# Altium PCB RotorStator_PowerControl.PcbDoc
Units mm, origin at the board's own origin, x right, y up, seen from the top; angles counter-clockwise.
Board outline 120 x 110 mm, 4 copper layers (TOP_SIG, GND, PWR, BTM_SIG), stack 1.586 mm thick; 55 components, 47 nets, 194 pads, 1858 vias.
Unrouted connection lines stored in the file: 2.
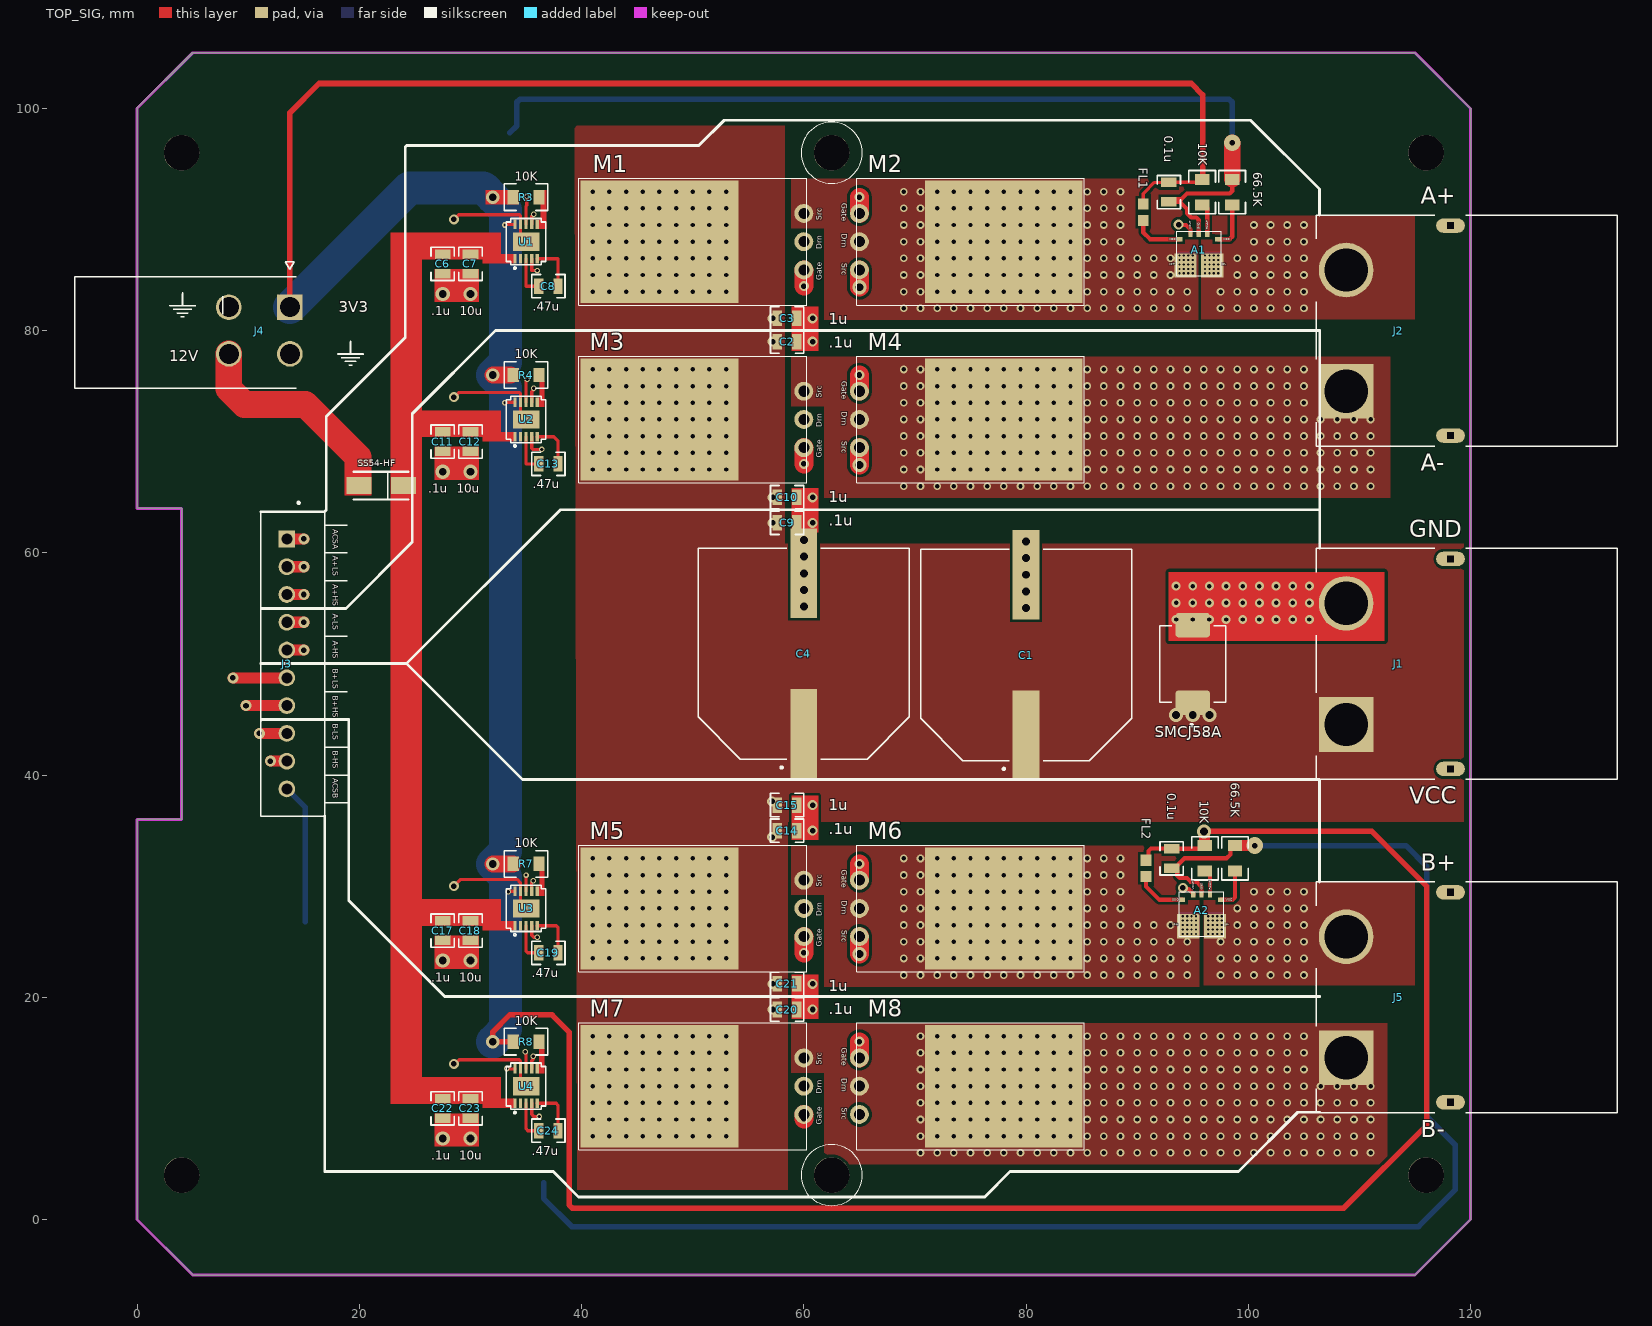
[diagram p0: TOP_SIG view]
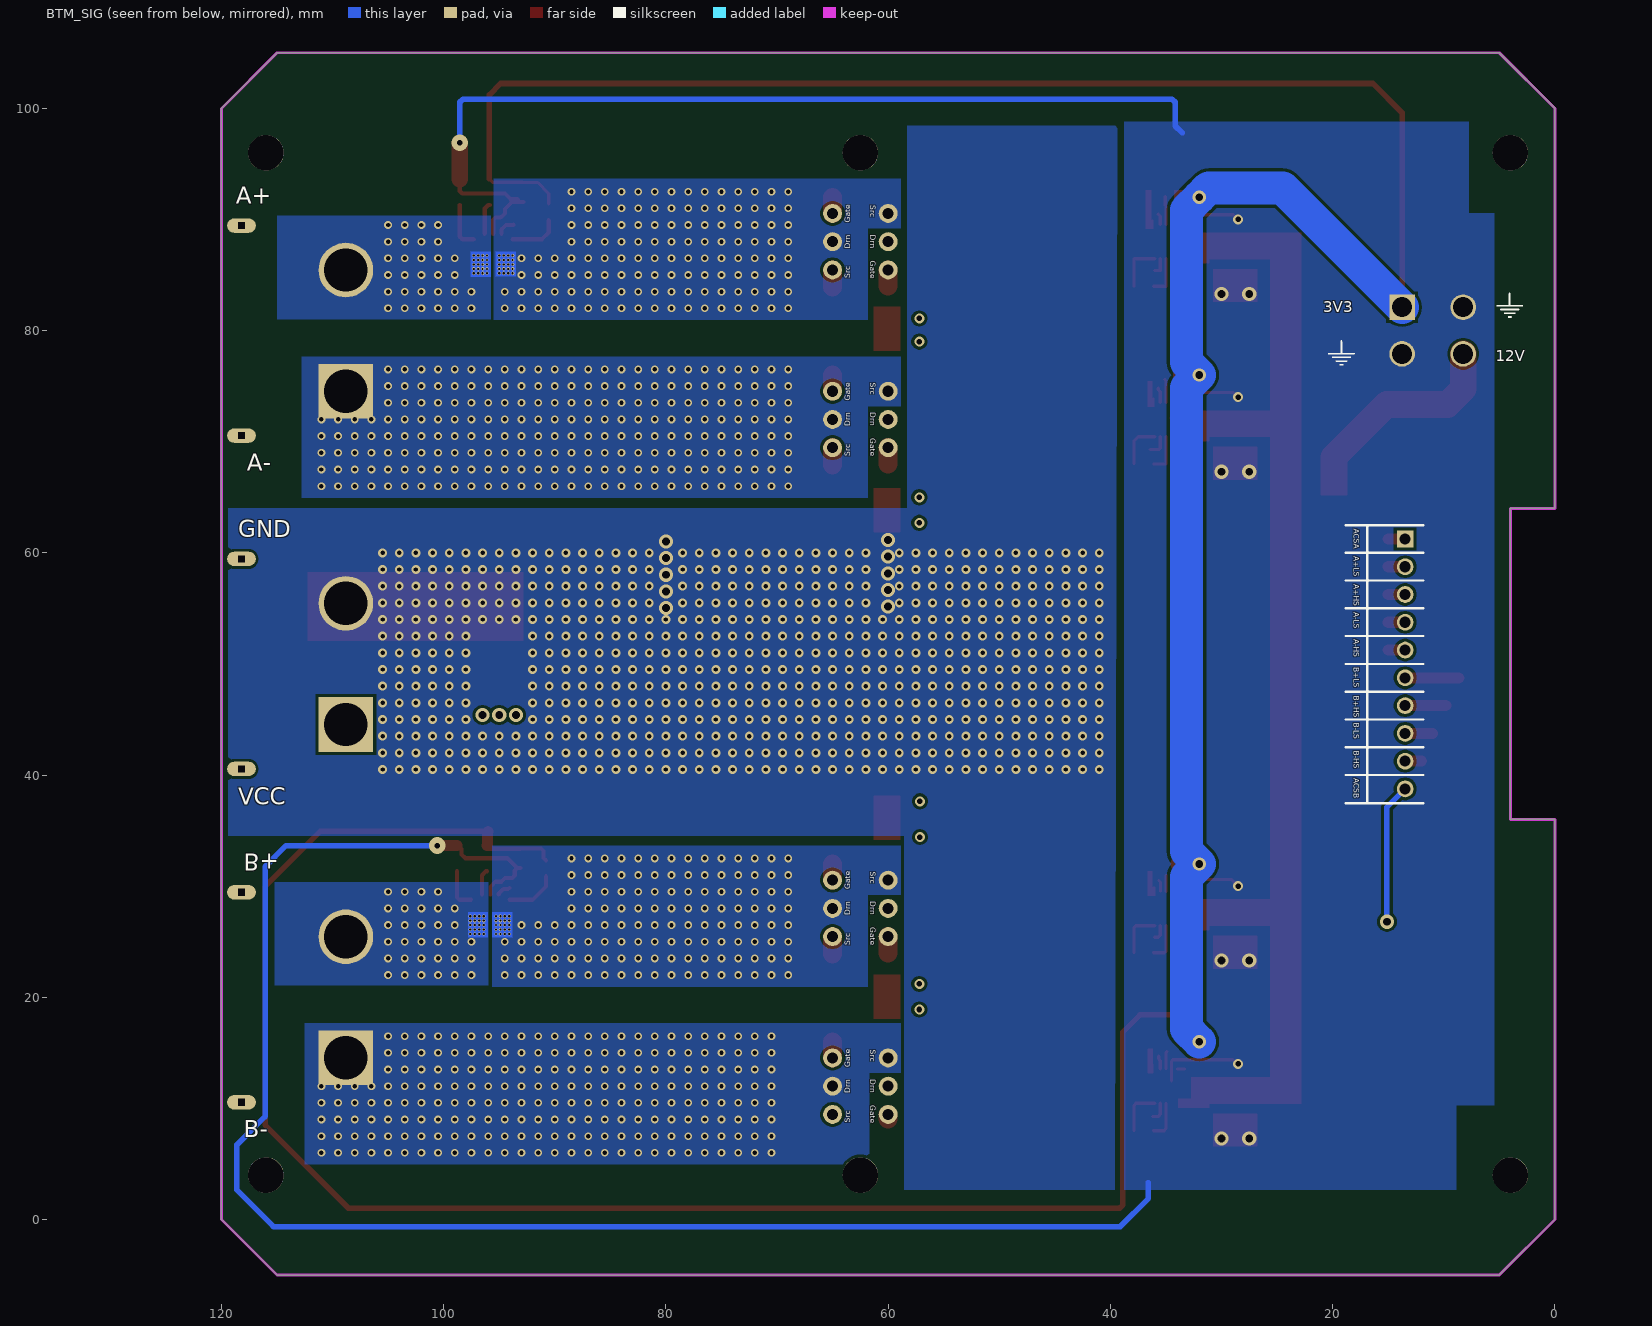
[diagram p1: BTM_SIG view, seen from below]
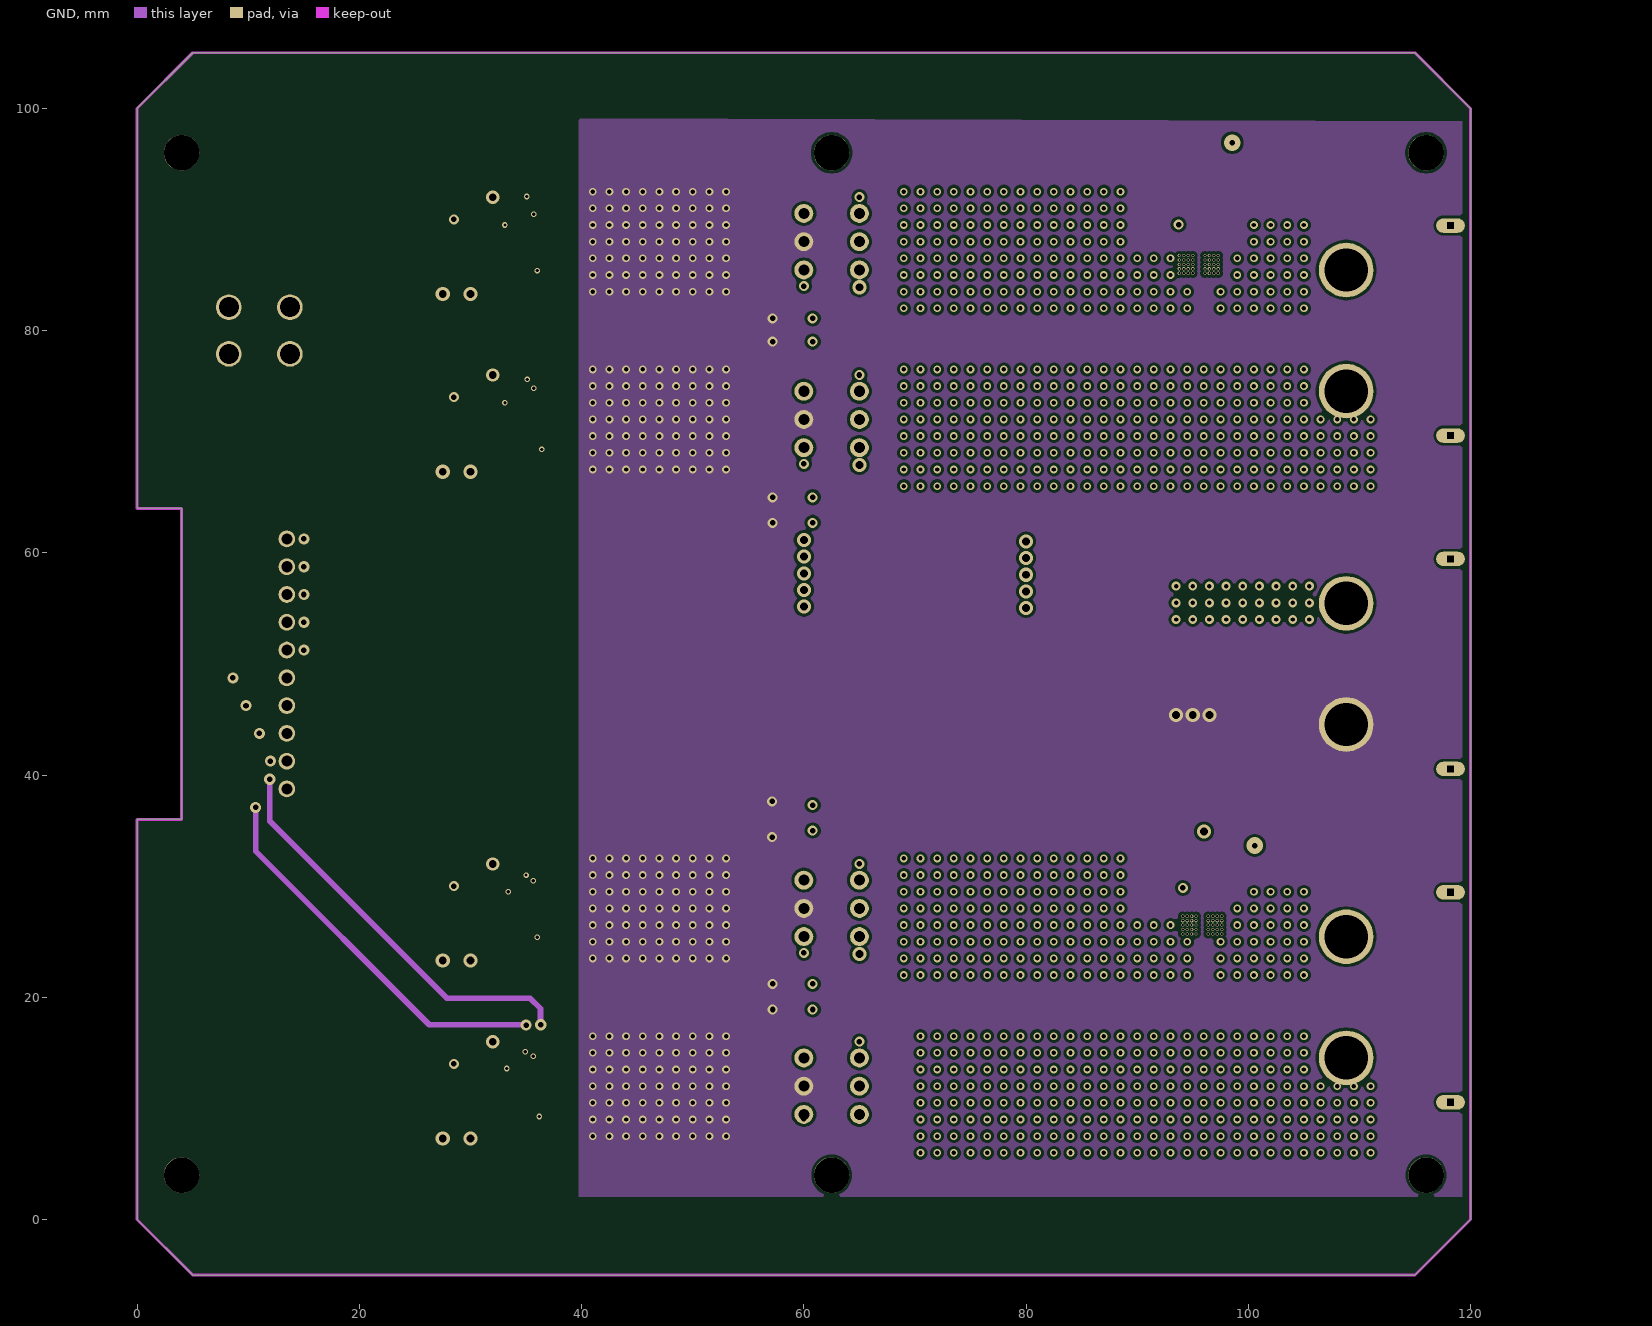
[diagram p2: GND]
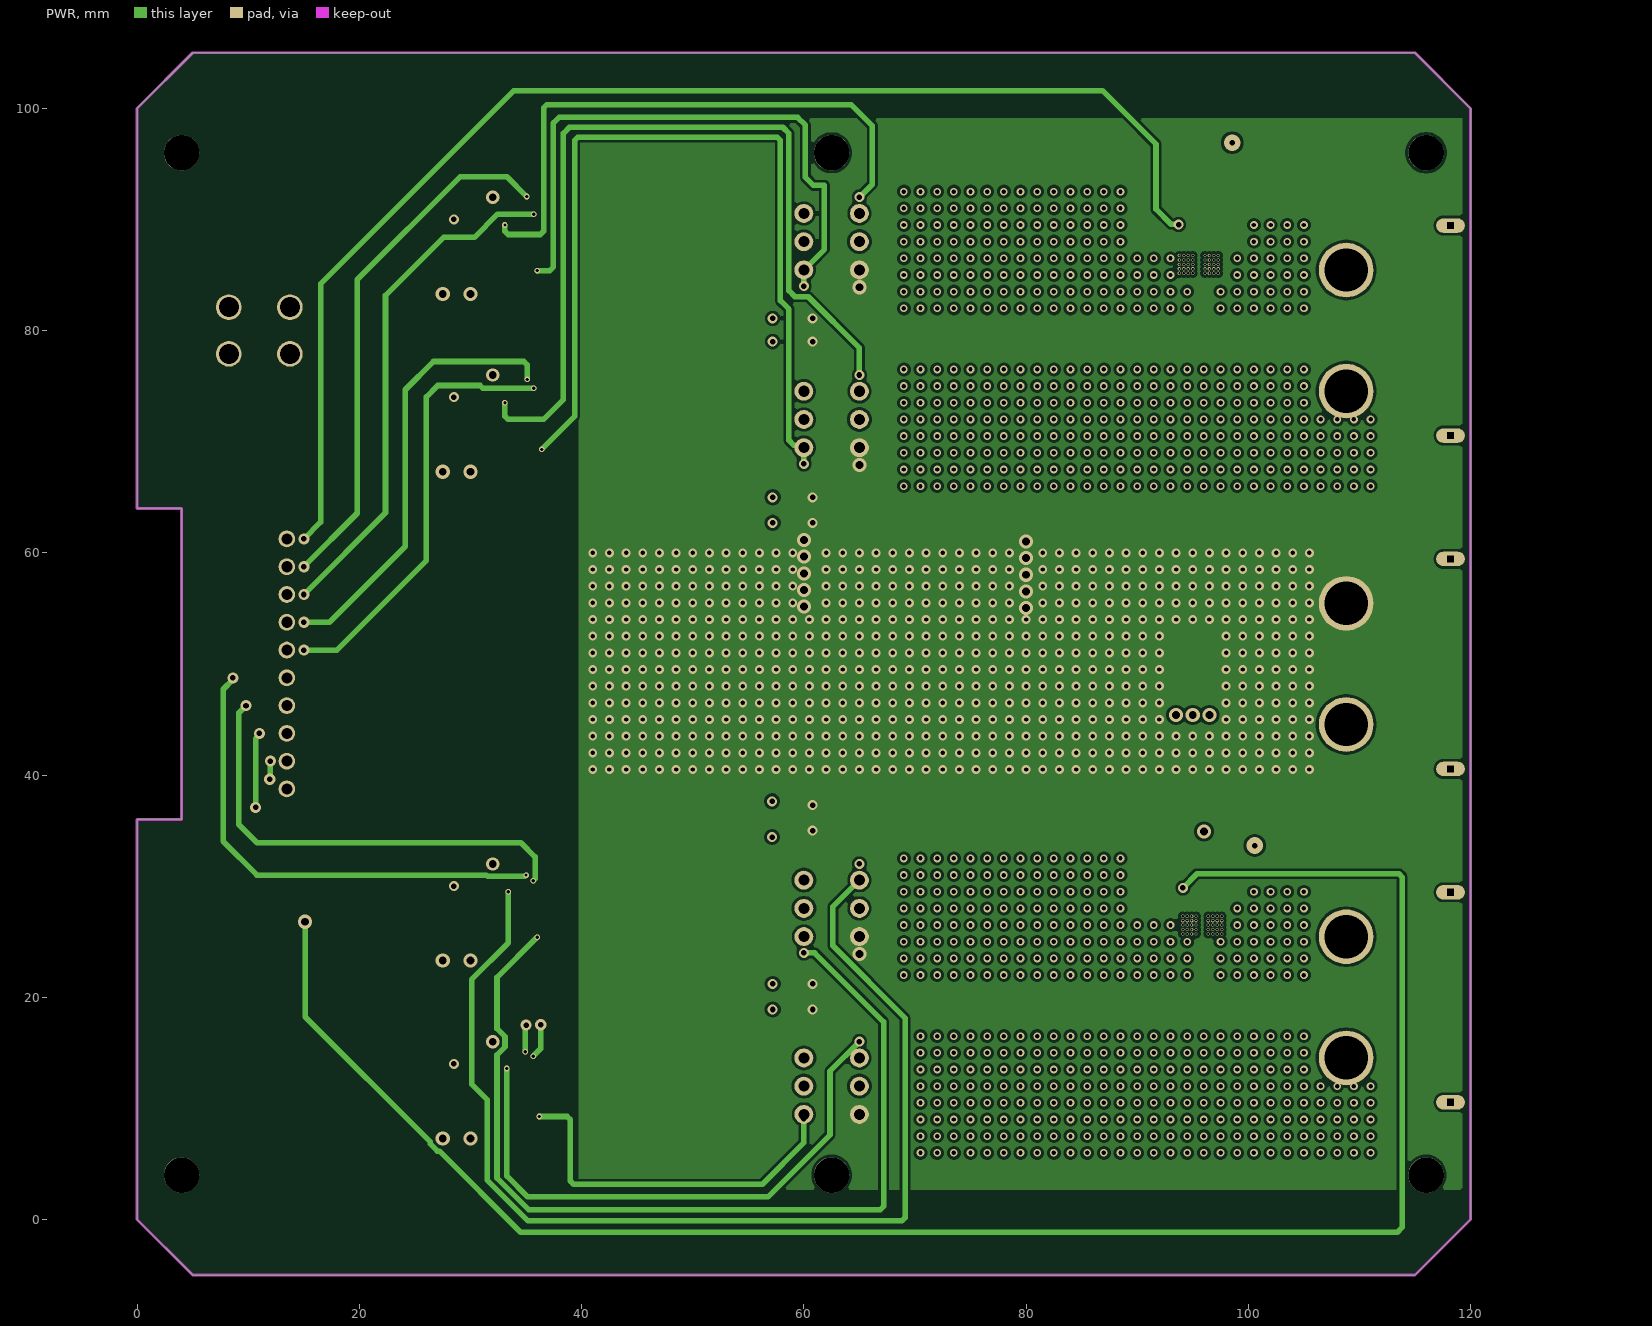
[diagram p3: PWR]
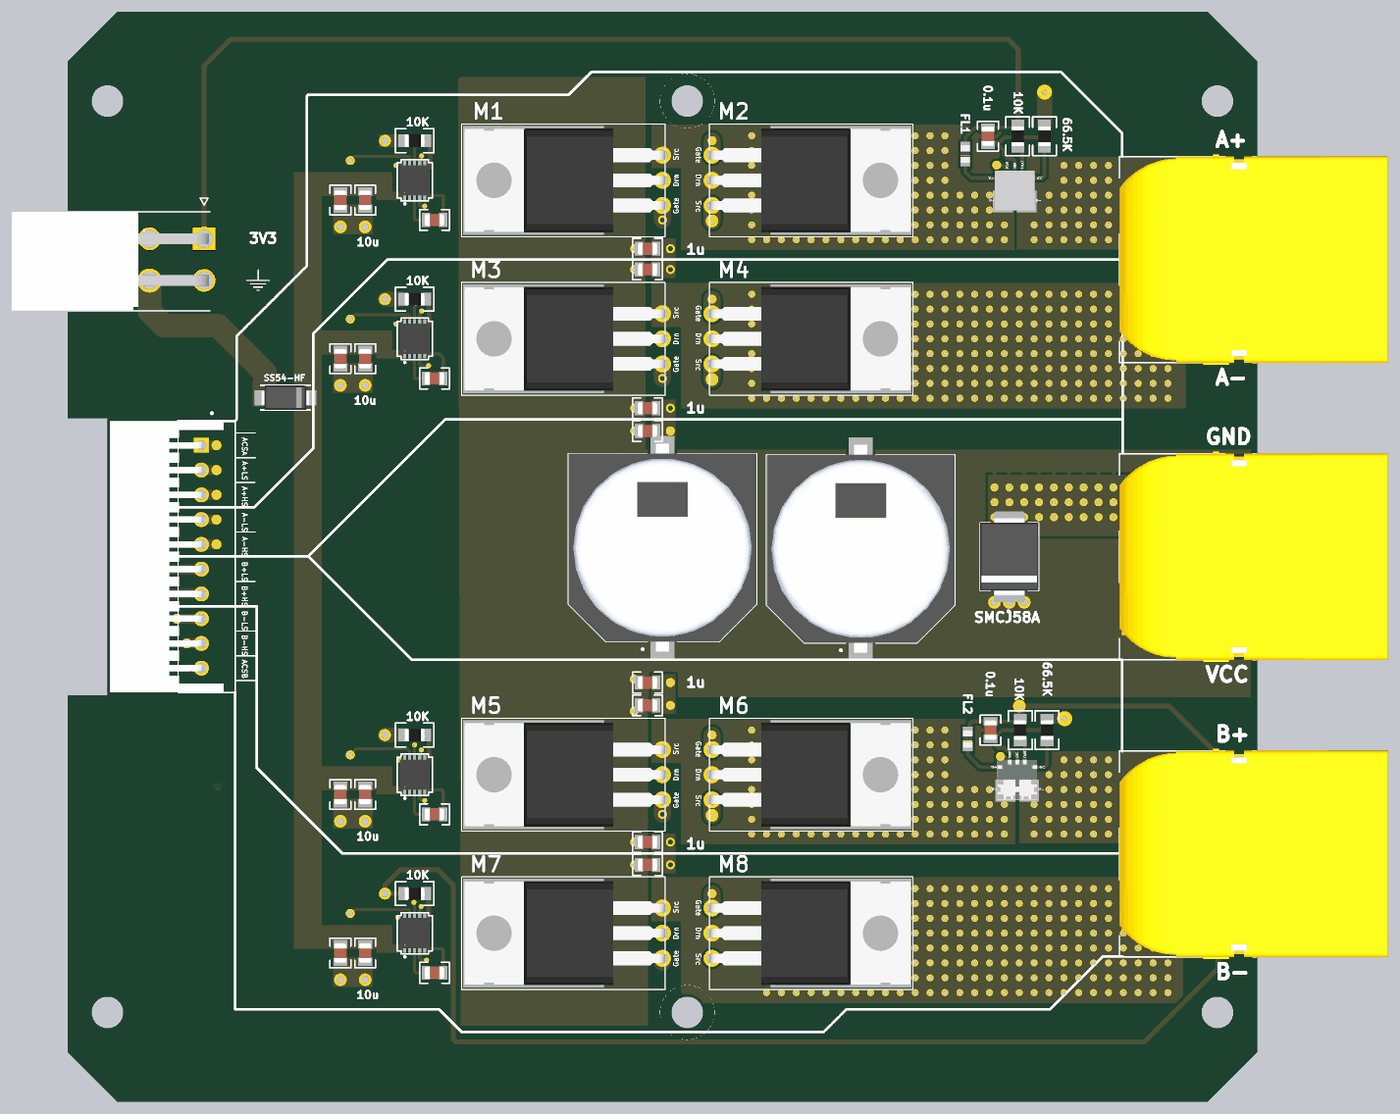
[diagram p4: 3D render of the assembled board from above, using the file's embedded part models]

## Layer stack, top to bottom
Top Solder: solder mask 0.0254, SM-001, Dk 4
TOP_SIG: signal copper 0.035
Dielectric 1: prepreg 0.1052, PP-017, Dk 4.3
Dielectric 2: prepreg 0.1052, PP-017, Dk 4.3
GND: signal copper 0.0152
Dielectric 3: core 1.065, Core-039, Dk 4.8
PWR: signal copper 0.0152
Dielectric 4: prepreg 0.1052, PP-017, Dk 4.3
Dielectric 5: prepreg 0.1052, PP-017, Dk 4.3
BTM_SIG: signal copper 0.035
Bottom Solder: solder mask 0.0254, SM-001, Dk 4

## Board outline
0,36 4,36 4,64 0,64 0,100 5,105 115,105 120,100 120,0 115,-5 5,-5 0,0

## Design rules (kind name [scope] priority, off if disabled: settings)
AssemblyTestPointUsage [All] p1: isadvanced=TRUE
AssemblyTestpoint [All] p1: isadvanced=TRUE testpointundercomponent=TRUE minsize=1.016 maxsize=2.54 preferedsize=1.524 minholesize=0 maxholesize=1.016 preferedholesize=0.813 testpointgrid=0.025 usegrid=TRUE gridtolerance=0 allowsidetop=TRUE allowsidebottom=TRUE
Clearance Clearance_1 [(ExistsOnLayer('GND') Or ExistsOnLayer('PWR')) vs (ExistsOnLayer('GND') Or ExistsOnLayer('PWR'))] p1: gap=0.254 ignorepadtopadclearanceinfootprint=FALSE sourcerule=40 cellrowname=All cellrowtype=0 cellcolname=All cellcoltype=0 innerlayers=TRUE
Clearance Clearance_2 [(ExistsOnLayer('TOP_SIG') Or ExistsOnLayer('BTM_SIG')) vs (ExistsOnLayer('TOP_SIG') Or ExistsOnLayer('BTM_SIG'))] p2: gap=0.254 ignorepadtopadclearanceinfootprint=FALSE sourcerule=40 cellrowname=All cellrowtype=0 cellcolname=All cellcoltype=0 outerlayers=TRUE
Clearance [All] p3: gap=0.254 ignorepadtopadclearanceinfootprint=FALSE ismatrix=TRUE
ComponentClearance [All] p1: isadvanced=TRUE gap=0.254 collisioncheckmode=3 verticalgap=0.254 showdistances=FALSE
FabricationTestPointUsage [All] p1: isadvanced=TRUE valid=0 allowmultiple=FALSE
FabricationTestpoint [All] p1: isadvanced=TRUE side=3 testpointundercomponent=TRUE minsize=1.016 maxsize=2.54 preferedsize=1.524 minholesize=0 maxholesize=1.016 preferedholesize=0.813 testpointgrid=0.025 allowsidetop=TRUE allowsidebottom=TRUE usegrid=TRUE gridtolerance=0
FanoutControl Fanout_BGA [IsBGA] p1: isadvanced=TRUE bgadir=Out bgaviamode=Centered fanoutstyle=Auto fanoutdirection=Alternating viagrid=0.025 // Fanout_BGA (Default Rule)
FanoutControl Fanout_LCC [IsLCC] p2: isadvanced=TRUE bgadir=Out bgaviamode=Centered fanoutstyle=Auto fanoutdirection=Alternating viagrid=0.025 // Fanout_LCC (Default Rule)
FanoutControl Fanout_SOIC [IsSOIC] p3: isadvanced=TRUE bgadir=Out bgaviamode=Centered fanoutstyle=Auto fanoutdirection=Alternating viagrid=0.025 // Fanout_SOIC (Default Rule)
FanoutControl Fanout_Small [(CompPinCount < 5)] p4: isadvanced=TRUE bgadir=Out bgaviamode=Centered fanoutstyle=Auto fanoutdirection=OutThenIn viagrid=0.025 // Fanout_Small (Default Rule)
FanoutControl Fanout_Default [All] p5: isadvanced=TRUE bgadir=Out bgaviamode=Centered fanoutstyle=Auto fanoutdirection=Alternating viagrid=0.025 // Fanout_Default (Default Rule)
Height [All] p1: isadvanced=TRUE minheight=0 maxheight=25.4 prefheight=12.7
HoleSize [All] p1: isadvanced=TRUE absolutevalues=TRUE maxlimit=2.54 minlimit=0.025 maxpercent=80.000 minpercent=20.000
HoleToHoleClearance [All] p1: isadvanced=TRUE gap=0.254 allowstackedmicrovias=TRUE
LayerPairs [All] p1: isadvanced=TRUE enforce=TRUE
MinimumSolderMaskSliver [All] p1: isadvanced=TRUE minsoldermaskwidth=0.254
NetAntennae [All] p1: isadvanced=TRUE netantennaetolerance=0
PasteMaskExpansion [All] p1: isadvanced=TRUE expansion=0
PlaneClearance [All] p1: isadvanced=TRUE clearance=0.508
PlaneConnect [All] p1: isadvanced=TRUE planeconnectstyle=Relief reliefexpansion=0.508 reliefentries=4 reliefconductorwidth=0.254 reliefairgap=0.254
PolygonConnect [All] p1: connectstyle=Direct reliefconductorwidth=0.254 reliefentries=4 polygonreliefangle="90 Angle" airgapwidth=0.254
RoutingCorners [All] p1: isadvanced=TRUE cornerstyle=45-Degree minsetback=2.54 maxsetback=2.54
RoutingPriority [All] p1: isadvanced=TRUE routingpriority=0
RoutingVias [All] p1: holewidth=0.711 width=1.27 viastyle="Through Hole" minholewidth=0.711 minwidth=1.27 maxholewidth=0.711 maxwidth=1.27
ShortCircuit [All] p1: isadvanced=TRUE allowed=FALSE
SilkToSilkClearance [All] p1: isadvanced=TRUE silktosilkclearance=0.254
SilkToSolderMaskClearance [IsPad] p1: isadvanced=TRUE minsilkscreentomaskgap=0.254 clearancetoexposedcopper=TRUE
SolderMaskExpansion [All] p1: isadvanced=TRUE expansion=0 istentingtop=FALSE
SupplyNets "Schematic Supply Nets_4" [InNet('3V3')] p1: isadvanced=TRUE voltage=0.000
SupplyNets "Schematic Supply Nets_3" [InNet('VBAT1')] p2: isadvanced=TRUE voltage=0.000
SupplyNets "Schematic Supply Nets_1" [InNet('GND')] p3: isadvanced=TRUE voltage=0.000
SupplyNets "Schematic Supply Nets" [InNet('12V')] p4: isadvanced=TRUE voltage=0.000
UnRoutedNet [All] p1: isadvanced=TRUE
UnpouredPolygon [All] p1: isadvanced=TRUE
Width [All] p1 off: maxlimit=0.254 minlimit=0.254 preferedwidth=0.254
4 further rules are at their usual default settings.

## Classes and differential pairs
component class RotorStator_PowerControl: 0.1U 1 3 6 A1 A2 C1 C4 C5 C10 C12 C15 C16 C17 C21 FL1 FL2 J1 J3 M1 M3 M6 M8 R1 R2 R3 SMCJ1 SS1 U1 U2

## Components (designator, comment, footprint, x,y, rotation, side; value= is the part's Value field where it differs from the comment)
0.1u "Capacitor" CAP0805R 93.1,32.5 r270 top value=0.1uF (schematic designator C16)
0.1u "Capacitor" CAP0805R 92.846,92.455 r270 top locked value=0.1uF (schematic designator C5)
10K "Resistor" RES0805W 96.1,32.5 r270 top value=10K (schematic designator R5)
10K "Resistor" RES0805W 95.846,92.455 r270 top locked value=10K (schematic designator R1)
66.5K "Resistor" RES0805W 98.8,32.5 r90 top value=66.5K (schematic designator R6)
66.5K "Resistor" RES0805W 98.546,92.455 r90 top locked value=66.5K (schematic designator R2)
A1 "ACS37220" ACS37220 95.546,86.955 r0 top locked
A2 "ACS37220" ACS37220 95.8,27.5 r0 top
C1 "MAL215099913E3" CAPAE1900X2200N 80,50.8 r90 top
C2 "Capacitor" CAP0805R 58.5,79 r0 top locked value=100nF
C3 "Capacitor" CAP0805R 58.5,81.1 r0 top locked value=1uF
C4 "MAL215099913E3" CAPAE1900X2200N 60,50.927 r90 top
C6 "Capacitor" CAP0805R 27.5,86 r270 top value=100nF
C7 "Capacitor" CAP0805R 30,86 r270 top value=10uF
C8 "Capacitor" CAP0805R 37,84 r0 top value=470nF
C9 "Capacitor" CAP0805R 58.5,62.7 r0 top locked value=100nF
C10 "Capacitor" CAP0805R 58.5,65 r0 top locked value=1uF
C11 "Capacitor" CAP0805R 27.5,70 r270 top value=100nF
C12 "Capacitor" CAP0805R 30,70 r270 top value=10uF
C13 "Capacitor" CAP0805R 37,68 r0 top value=470nF
C14 "Capacitor" CAP0805R 58.5,35 r0 top locked value=100nF
C15 "Capacitor" CAP0805R 58.5,37.3 r0 top locked value=1uF
C17 "Capacitor" CAP0805R 27.5,26 r270 top locked value=100nF
C18 "Capacitor" CAP0805R 30,26 r270 top locked value=10uF
C19 "Capacitor" CAP0805R 37,24 r0 top locked value=470nF
C20 "Capacitor" CAP0805R 58.5,18.9 r0 top locked value=100nF
C21 "Capacitor" CAP0805R 58.5,21.2 r0 top locked value=1uF
C22 "Capacitor" CAP0805R 27.5,10 r270 top locked value=100nF
C23 "Capacitor" CAP0805R 30,10 r270 top locked value=10uF
C24 "Capacitor" CAP0805R 37,8 r0 top locked value=470nF
FL1 "BLM18AG601SN1" BEADC1608X95N 90.546,90.655 r270 top
FL2 "BLM18AG601SN1" BEADC1608X95N 90.8,31.6 r270 top
J1 "XT90PW-M" AMASS_XT90PW-M 118.2,50 r90 top locked
J2 "XT90PW-M" AMASS_XT90PW-M 118.2,80 r90 top locked
J3 "B10B-XH-A" JST_B10B-XH-A 14,50 r270 top
J4 "353180420" MOLEX_353180420 13.75,80 r90 top
J5 "XT90PW-M" AMASS_XT90PW-M 118.2,20 r90 top locked
M1 "IRFB4115" IRFB4115 60,88 r90 top locked
M2 "IRFB4115" IRFB4115 65,88 r270 top locked
M3 "IRFB4115" IRFB4115 60,72 r90 top
M4 "IRFB4115" IRFB4115 65,72 r270 top
M5 "IRFB4115" IRFB4115 60,28 r90 top locked
M6 "IRFB4115" IRFB4115 65,28 r270 top locked
M7 "IRFB4115" IRFB4115 60,12 r90 top locked
M8 "IRFB4115" IRFB4115 65,12 r270 top locked
R3 "Resistor" RES0805W 35,92 r0 top value=10K
R4 "Resistor" RES0805W 35,76 r0 top value=10K
R7 "Resistor" RES0805W 35,32 r0 top locked value=10K
R8 "Resistor" RES0805W 35,16 r0 top locked value=10K
SMCJ58A "SMCJ58A" DIOM7959X262N 95,50 r90 top locked (schematic designator D2)
SS54-HF "SS54-HF" DIOM5025X220N 21.95,66.052 r180 top (schematic designator D1)
U1 "A89500GEJTR-T" A89500GEJTR-T 35,88 r90 top
U2 "A89500GEJTR-T" A89500GEJTR-T 35,72 r90 top
U3 "A89500GEJTR-T" A89500GEJTR-T 35,28 r90 top locked
U4 "A89500GEJTR-T" A89500GEJTR-T 35,12 r90 top locked

## Footprints (in the part's own frame and the unit in brackets; to place one, negate y for a bottom-side part, rotate by r counter-clockwise, add the part's x,y. Pads: shape width x height; smd on the part's side, far side on the other; paste and mask are expansions set on the pad)
A89500GEJTR-T [mm]
  rect 0.85x0.3 smd paste+0 mask+0: 1(-1.55,1) 2(-1.55,0.5) 3(-1.55,0) 4(-1.55,-0.5) 5(-1.55,-1) 6(1.55,-1) 7(1.55,-0.5) 8(1.55,0) 9(1.55,0.5) 10(1.55,1)
  rect 1.64x2.38 smd paste+0 mask+0: 11(0,0)
  silkscreen extent -2.48,-1.78 2.08,1.78, body extent -1.52,-1.52 1.52,1.52, height 0.81
ACS37220 [mm]
  rect 2x2.2 smd: 1(-1.2,-1.1) 2(1.2,-1.1)
  rect 0.55x0.38 smd: 3(-1.75,1.27) 7(1.75,1.27)
  rect 0.38x0.55 smd: 4(-0.76,1.75) 5(0,1.75) 6(0.76,1.75)
  silkscreen extent -2,-2 2,2, body extent -2,-2 2,2, height 1.63
AMASS_XT90PW-M [mm]
  round 4.916 hole 3.9: N(5.45,9.4)
  rect 4.916x4.916 / inner round 4.916 / far side rect 4.916x4.916 hole 3.9: P(-5.45,9.4)
  oval 1.3x2.6 hole 0.6 square: S1(-9.45,0) S2(9.45,0)
  silkscreen extent -10.4,-15 10.4,12.1, body extent -10.6,-15 10.6,12.1, height 10.3
BEADC1608X95N [mm]
  rect 1x0.97 smd: 1(-0.735,0) 2(0.735,0)
  body extent -0.88,-0.47 0.88,0.47, height 0.94
CAP0805R [mm] "capacitor 0805 reflow soldering"
  rect 0.85x1.4 smd: 1(-0.875,0) 2(0.875,0)
  silkscreen extent -1.5,-1.05 1.5,1.05, body extent -1,-0.63 1,0.63, height 0.78
CAPAE1900X2200N [mm]
  rect 8.06x2.41 smd: 1(-7.225,0) 2(7.225,0)
  silkscreen extent -10.35,-9.5 9.5,9.5, body extent -10.5,-9.5 10.5,9.5, height 22
DIOM5025X220N [mm]
  rect 2.25x1.55 smd: 1(-2,0) 2(2,0)
  silkscreen extent -2.47,-1.25 2.47,1.25, body extent -2.47,-1.25 2.47,1.25, height 2.2
DIOM7959X262N [mm]
  rrect25% 2.18x3.12 smd: A(3.485,0) C(-3.485,0)
  silkscreen extent -5.6,-2.95 3.43,2.95, body extent -3.97,-2.95 3.97,2.95, height 2.65
IRFB4115 [mm]
  rect 11x14.2 smd: D(0,13)
  round 1.7 hole 1: D(0,0) G(-2.54,0) S(2.54,0)
  silkscreen extent -5.7,-0.25 5.7,20.25, body extent -5.25,-0.25 5.25,20, height 4.65
JST_B10B-XH-A [mm]
  rect 1.508x1.508 / inner round 1.508 / far side rect 1.508x1.508 hole 1: 1(-11.25,-0.525)
  round 1.508 hole 1: 2(-8.75,-0.525) 3(-6.25,-0.525) 4(-3.75,-0.525) 5(-1.25,-0.525) 6(1.25,-0.525) 7(3.75,-0.525) 8(6.25,-0.525) 9(8.75,-0.525) 10(11.25,-0.525)
  silkscreen extent -14.6,-2.88 13.7,4.9, body extent -13.7,-9.78 13.7,1.72, height 6.1
MOLEX_353180420 [mm]
  rect 2.3x2.3 / inner round 2.3 / far side rect 2.3x2.3 hole 1.8 mask+0.076: 1(2.1,0)
  round 2.3 hole 1.8 mask+0.076: 2(-2.1,0) 3(2.1,5.5) 4(-2.1,5.5)
  silkscreen extent -5.19,-0.58 6.2,19.36, body extent -5.2,-0.51 4.8,19.43, height 11.4
RES0805W [mm] "2012급"
  rect 1x1.3 smd: 1(-1.15,0) 2(1.15,0)
  silkscreen extent -1.95,-1.2 1.95,1.2, body extent -1,-0.62 1,0.63, height 0.5

## Part data
C1 C4: "Cap Aluminum Lytic 470uF 100V 20% (18 X 21mm) SMD 1450mA 5000h 105Â°C Automotive AEC-Q200 T/R", Package=None, Check_prices=https://www.snapeda.com/parts/MAL215099913E3/Vishay/view-part/?ref=eda, MF="Vishay Beyschlag/Draloric", MP=MAL215099913E3, SnapEDA_Link=https://www.snapeda.com/parts/MAL215099913E3/Vishay/view-part/?ref=snap
FL1 FL2: "600 Ohms @ 100 MHz 1 - Ferrite Bead 0603 (1608 Metric) 500mA 380mOhm", Package="0603 Murata Electronics", Check_prices=https://www.snapeda.com/parts/BLM18AG601SN1/Murata+Electronics+North+America/view-part/?ref=eda, MF="Murata Electronics", MP=BLM18AG601SN1, SnapEDA_Link=https://www.snapeda.com/parts/BLM18AG601SN1/Murata+Electronics+North+America/view-part/?ref=snap
J1 J2 J5: "Socket; DC supply; XT90; male; PIN: 2; on PCBs; THT; Colour: yellow", Package=Package, Check_prices=https://www.snapeda.com/parts/XT90PW-M/AMASS/view-part/?ref=eda, MF=AMASS, MP=XT90PW-M, SnapEDA_Link=https://www.snapeda.com/parts/XT90PW-M/AMASS/view-part/?ref=snap
J3: Package=None, Availability=Unavailable, MF="{'manufacturer': u'JST Sales America Inc.'}", MP=B10B-XH-A, Price=None
J4: "Connector Header Through Hole, Right Angle 4 position 0.165in (4.20mm)", Package=None, Availability=Unavailable, MP=353180420, Price=None
SMCJ58A: "93.6V Clamp 16.1A Ipp Tvs Diode Surface Mount DO-214AB (SMC)", Package="DO-214 Fairchild Semiconductor", Check_prices=https://www.snapeda.com/parts/SMCJ58A/Fairchild+Imaging/view-part/?ref=eda, MF="Fairchild Semiconductor", MP=SMCJ58A, SnapEDA_Link=https://www.snapeda.com/parts/SMCJ58A/Fairchild+Imaging/view-part/?ref=snap
SS54-HF: "Diode Schottky 40 V 5A Surface Mount DO-214AC (SMA)", Package="DO-214AC-214 Comchip Technology", Check_prices=https://www.snapeda.com/parts/SS54-HF/Comchip/view-part/?ref=eda, MF="Comchip Technology", MP=SS54-HF, SnapEDA_Link=https://www.snapeda.com/parts/SS54-HF/Comchip/view-part/?ref=snap
U1 U2 U3 U4: "Description", Manufacturer_Name="Allegro Microsystems Inc.", Copyright="Copyright (C) 2025 Ultra Librarian. All rights reserved.", Manufacturer_Part_Number=A89500GEJTR-T, RefDes=RefDes, Type=Type
0.1u 0.1u C2 C3 C6 C7 C8 C9 C10 C11 C12 C13 C14 C15 C17 C18 C19 C20 C21 C22 C23 C24: SimulationGenericComponent=True
10K 10K 66.5K 66.5K R3 R4 R7 R8: SimulationGenericComponent=True, TC1=0, TC2=0

## Free pads (board coordinates)
  round 3.2 hole 3.2 unplated: 78(4,96) 79(4,4) 79(116,4) 79(116,96) 80(62.5,4) 80(62.5,96)

## Via types
v1: diameter 0.7, hole 0.4, TOP_SIG to BTM_SIG, 747 vias
v2: diameter 0.8, hole 0.4, PWR to BTM_SIG, 563 vias
v3: diameter 0.7, hole 0.4, TOP_SIG to GND, 252 vias
v4: diameter 0.3, hole 0.2, TOP_SIG to BTM_SIG, 178 vias
v5: diameter 0.8, hole 0.4, TOP_SIG to BTM_SIG, 27 vias
v6: diameter 0.9, hole 0.5, TOP_SIG to PWR, 18 vias
v7: diameter 0.5, hole 0.3, TOP_SIG to PWR, 16 vias
v8: diameter 1.27, hole 0.711, TOP_SIG to BTM_SIG, 13 vias
v9: diameter 0.9, hole 0.5, TOP_SIG to BTM_SIG, 12 vias
v10: diameter 1, hole 0.5, TOP_SIG to PWR, 9 vias
v11: diameter 1.27, hole 0.7, TOP_SIG to BTM_SIG, 8 vias
v12: diameter 1.27, hole 0.711, TOP_SIG to PWR, 4 vias
v13: diameter 1, hole 0.5, GND to PWR, 4 vias
v14: diameter 1.2, hole 0.7, TOP_SIG to BTM_SIG, 4 vias
v15: diameter 1.5, hole 0.5, TOP_SIG to BTM_SIG, 2 vias
v16: diameter 1.27, hole 0.711, PWR to BTM_SIG, 1 vias

## Nets (pads, with @x,y where several pads share a name; then routed paths per layer and width w, separated by ;. In a path a pad name is that pad's centre, name@x,y a point inside that pad or via, vN(x,y) a via of type N, cw(c..) or ccw(c..) an arc to the next point about the centre after c; other vN are vias at no path point)
3V3: 0.1u.1 10K.1 A1.3 FL1.1 FL1.2 FL2.1 J4.1 R3.1 R4.1 R7.1 R8.1 | length 383.5
  TOP_SIG w0.3: FL1.1 90.546,92.324 91.552,93.33 0.1u.1@92.846,93.33 ; 0.1u.1@92.861,93.345 95.586,93.345 10K.1@95.885,93.644
  TOP_SIG w0.38: FL1.2 90.546,88.835 91.156,88.225 A1.3 ; FL2.1 91.01,32.545 91.01,33.156 91.233,33.379 93.096,33.379 93.1,33.375 95.825,33.375 10K.1@96.1,33.65
  TOP_SIG w0.5: J4.1 13.75,99.602 16.383,102.235 94.869,102.235 95.885,101.219 10K.1@95.885,93.644 ; R8.1 v14(32,16) 32.011,16.011 32.011,16.898 33.528,18.415 37.338,18.415 38.884,16.869 38.884,1.309 39.177,1.016 108.585,1.016 116.078,8.509 116.078,29.972 111.125,34.925 v12(96.012,34.925)
  TOP_SIG w1: v12(96.012,34.925) 96.056,34.881 96.056,33.65 10K.1@96.1,33.65
  TOP_SIG w1.5: v14(32,32) R7.1 ; v14(32,76) R4.1@33.607,76
  BTM_SIG w3: J4.1 24.487,92.837 31.163,92.837 v14(32,92) 33.147,90.853 33.147,77.147 v14(32,76) 33.147,74.853 33.147,33.147 v14(32,32) 33.147,30.853 33.147,17.147 v14(32,16)
12V: J4.4 SS54-HF.2 | length 19.4
  TOP_SIG w2.4: J4.4 8.25,74.755 9.656,73.349 15.144,73.349 19.875,68.618 SS54-HF.2@19.875,66.485
GND: 0.1u.2 66.5K.2 A1.5 A2.5 C1.2 C2.2 C3.2 C4.2 C6.2 C7.2 C9.2 C10.2 C11.2 C12.2 C14.2 C15.2 C17.2 C18.2 C20.2 C21.2 C22.2 C23.2 J1.N J4.2 J4.3 M2.S M4.S M6.S M8.S SMCJ58A.A U1.9 U1.11 U2.9 U2.11 U3.9 U3.11 U4.9 U4.11 | length 277.6
  TOP_SIG w0.254: U2.9 34.5,72.18 U2.11@34.544,72.136 ; C20.2 v6(60.8,18.9) ; C21.2 v6(60.8,21.2) ; C14.2 v6(60.8,35) ; C15.2 v6(60.8,37.3) ; C2.2 v6(60.8,79) ; C3.2 v6(60.8,81.1)
  TOP_SIG w0.3: v9(28.5,14) 28.579,14 28.972,14.393 34.375,14.393 34.5,14.268 U4.9 U4.11@34.5,12.49 ; v9(28.5,30) 29.107,30.607 34.202,30.607 34.5,30.309 U3.9 U3.11@34.5,28.404 ; v9(28.5,74) 28.922,74.422 34.417,74.422 34.5,74.339 U2.9 ; v9(28.5,90) 28.924,90.424 34.417,90.424 34.5,90.341 U1.9 U1.11@34.5,88.182
  TOP_SIG w0.38: 0.1u.2@92.846,91.58 0.1u.2@93.121,91.58 ; 0.1u.2@93.1,31.625 0.1u.2@93.368,31.625 ; A1.5 95.546,89.947 95.323,90.17 94.869,90.17 94.488,90.551 94.488,90.932 93.84,91.58 0.1u.2@93.121,91.58 ; A2.5 95.8,29.93 95.324,30.406 94.805,30.406 94.477,30.734 93.825,30.734 93.603,30.957 93.603,31.39 0.1u.2@93.368,31.625 ; 66.5K.2@98.552,93.599 98.552,92.552 98.329,92.329 94.495,92.329 93.993,91.827 93.964,91.827 93.952,91.815 93.356,91.815 0.1u.2@93.121,91.58 ; 66.5K.2@98.8,33.65 98.702,33.65 98.392,33.34 98.392,32.862 98.043,32.512 94.262,32.512 93.375,31.625 0.1u.2@93.368,31.625
  TOP_SIG w1: 66.5K.2@98.8,33.65 100.579,33.65 v15(100.584,33.655)
  TOP_SIG w1.5: 66.5K.2@98.552,93.611 v15(98.552,96.901)
  TOP_SIG w1.7: v12@65,23.89 v12(65,23.9) M6.S ; v12(65,67.9) M4.S ; v12(65,83.9) M2.S
  BTM_SIG w0.5: 33.528,97.79 34.163,98.425 34.163,100.545 34.456,100.838 98.259,100.838 98.552,100.545 v15(98.552,96.901) ; 36.576,3.302 36.576,1.905 39.116,-0.635 115.316,-0.635 118.618,2.667 118.618,6.731 116.078,9.271 116.078,31.75 114.173,33.655 v15(100.584,33.655)
  other v2: 41,40.5 42.5,40.5 44,40.5 45.5,40.5 47,40.5 48.5,40.5 50,40.5 51.5,40.5 53,40.5 54.5,40.5 56,40.5 57.5,40.5 59,40.5 60.5,40.5 62,40.5 63.5,40.5 65,40.5 66.5,40.5 68,40.5 69.5,40.5 71,40.5 72.5,40.5 74,40.5 75.5,40.5 77,40.5 78.5,40.5 80,40.5 81.5,40.5 83,40.5 84.5,40.5 86,40.5 87.5,40.5 89,40.5 90.5,40.5 92,40.5 93.5,40.5 95,40.5 96.5,40.5 98,40.5 99.5,40.5 101,40.5 102.5,40.5 104,40.5 105.5,40.5 41,42 42.5,42 44,42 45.5,42 47,42 48.5,42 50,42 51.5,42 53,42 54.5,42 56,42 57.5,42 59,42 60.5,42 62,42 63.5,42 65,42 66.5,42 68,42 69.5,42 71,42 72.5,42 74,42 75.5,42 77,42 78.5,42 80,42 81.5,42 83,42 84.5,42 86,42 87.5,42 89,42 90.5,42 92,42 93.5,42 95,42 96.5,42 98,42 99.5,42 101,42 102.5,42 104,42 105.5,42 41,43.5 42.5,43.5 44,43.5 45.5,43.5 47,43.5 48.5,43.5 50,43.5 51.5,43.5 53,43.5 54.5,43.5 56,43.5 57.5,43.5 59,43.5 60.5,43.5 62,43.5 63.5,43.5 65,43.5 66.5,43.5 68,43.5 69.5,43.5 71,43.5 72.5,43.5 74,43.5 75.5,43.5 77,43.5 78.5,43.5 80,43.5 81.5,43.5 83,43.5 84.5,43.5 86,43.5 87.5,43.5 89,43.5 90.5,43.5 92,43.5 93.5,43.5 95,43.5 96.5,43.5 98,43.5 99.5,43.5 101,43.5 102.5,43.5 104,43.5 105.5,43.5 41,45 42.5,45 44,45 45.5,45 47,45 48.5,45 50,45 51.5,45 53,45 54.5,45 56,45 57.5,45 59,45 60.5,45 62,45 63.5,45 65,45 66.5,45 68,45 69.5,45 71,45 72.5,45 74,45 75.5,45 77,45 78.5,45 80,45 81.5,45 83,45 84.5,45 86,45 87.5,45 89,45 90.5,45 92,45 98,45 99.5,45 101,45 102.5,45 104,45 105.5,45 41,46.5 42.5,46.5 44,46.5 45.5,46.5 47,46.5 48.5,46.5 50,46.5 51.5,46.5 53,46.5 54.5,46.5 56,46.5 57.5,46.5 59,46.5 60.5,46.5 62,46.5 63.5,46.5 65,46.5 66.5,46.5 68,46.5 69.5,46.5 71,46.5 72.5,46.5 74,46.5 75.5,46.5 77,46.5 78.5,46.5 80,46.5 81.5,46.5 83,46.5 84.5,46.5 86,46.5 87.5,46.5 89,46.5 90.5,46.5 92,46.5 98,46.5 99.5,46.5 101,46.5 102.5,46.5 104,46.5 105.5,46.5 41,48 42.5,48 44,48 45.5,48 47,48 48.5,48 50,48 51.5,48 53,48 54.5,48 56,48 57.5,48 59,48 60.5,48 62,48 63.5,48 65,48 66.5,48 68,48 69.5,48 71,48 72.5,48 74,48 75.5,48 77,48 78.5,48 80,48 81.5,48 83,48 84.5,48 86,48 87.5,48 89,48 90.5,48 92,48 98,48 99.5,48 101,48 102.5,48 104,48 105.5,48 41,49.5 42.5,49.5 44,49.5 45.5,49.5 47,49.5 48.5,49.5 50,49.5 51.5,49.5 53,49.5 54.5,49.5 56,49.5 57.5,49.5 59,49.5 60.5,49.5 62,49.5 63.5,49.5 65,49.5 66.5,49.5 68,49.5 69.5,49.5 71,49.5 72.5,49.5 74,49.5 75.5,49.5 77,49.5 78.5,49.5 80,49.5 81.5,49.5 83,49.5 84.5,49.5 86,49.5 87.5,49.5 89,49.5 90.5,49.5 92,49.5 98,49.5 99.5,49.5 101,49.5 102.5,49.5 104,49.5 105.5,49.5 41,51 42.5,51 44,51 45.5,51 47,51 48.5,51 50,51 51.5,51 53,51 54.5,51 56,51 57.5,51 59,51 60.5,51 62,51 63.5,51 65,51 66.5,51 68,51 69.5,51 71,51 72.5,51 74,51 75.5,51 77,51 78.5,51 80,51 81.5,51 83,51 84.5,51 86,51 87.5,51 89,51 90.5,51 92,51 98,51 99.5,51 101,51 102.5,51 104,51 105.5,51 41,52.5 42.5,52.5 44,52.5 45.5,52.5 47,52.5 48.5,52.5 50,52.5 51.5,52.5 53,52.5 54.5,52.5 56,52.5 57.5,52.5 59,52.5 60.5,52.5 62,52.5 63.5,52.5 65,52.5 66.5,52.5 68,52.5 69.5,52.5 71,52.5 72.5,52.5 74,52.5 75.5,52.5 77,52.5 78.5,52.5 80,52.5 81.5,52.5 83,52.5 84.5,52.5 86,52.5 87.5,52.5 89,52.5 90.5,52.5 92,52.5 98,52.5 99.5,52.5 101,52.5 102.5,52.5 104,52.5 105.5,52.5 41,54 42.5,54 44,54 45.5,54 47,54 48.5,54 50,54 51.5,54 53,54 54.5,54 56,54 57.5,54 59,54 60.5,54 62,54 63.5,54 65,54 66.5,54 68,54 69.5,54 71,54 72.5,54 74,54 75.5,54 77,54 78.5,54 80,54 81.5,54 83,54 84.5,54 86,54 87.5,54 89,54 90.5,54 92,54 41,55.5 42.5,55.5 44,55.5 45.5,55.5 47,55.5 48.5,55.5 50,55.5 51.5,55.5 53,55.5 54.5,55.5 56,55.5 57.5,55.5 59,55.5 62,55.5 63.5,55.5 65,55.5 66.5,55.5 68,55.5 69.5,55.5 71,55.5 72.5,55.5 74,55.5 75.5,55.5 77,55.5 78.5,55.5 81.5,55.5 83,55.5 84.5,55.5 86,55.5 87.5,55.5 89,55.5 90.5,55.5 92,55.5 41,57 42.5,57 44,57 45.5,57 47,57 48.5,57 50,57 51.5,57 53,57 54.5,57 56,57 57.5,57 59,57 62,57 63.5,57 65,57 66.5,57 68,57 69.5,57 71,57 72.5,57 74,57 75.5,57 77,57 78.5,57 81.5,57 83,57 84.5,57 86,57 87.5,57 89,57 90.5,57 92,57 41,58.5 42.5,58.5 44,58.5 45.5,58.5 47,58.5 48.5,58.5 50,58.5 51.5,58.5 53,58.5 54.5,58.5 56,58.5 57.5,58.5 59,58.5 62,58.5 63.5,58.5 65,58.5 66.5,58.5 68,58.5 69.5,58.5 71,58.5 72.5,58.5 74,58.5 75.5,58.5 77,58.5 78.5,58.5 81.5,58.5 83,58.5 84.5,58.5 86,58.5 87.5,58.5 89,58.5 90.5,58.5 92,58.5 93.5,58.5 95,58.5 96.5,58.5 98,58.5 99.5,58.5 101,58.5 102.5,58.5 104,58.5 105.5,58.5 41,60 42.5,60 44,60 45.5,60 47,60 48.5,60 50,60 51.5,60 53,60 54.5,60 56,60 57.5,60 59,60 62,60 63.5,60 65,60 66.5,60 68,60 69.5,60 71,60 72.5,60 74,60 75.5,60 77,60 78.5,60 81.5,60 83,60 84.5,60 86,60 87.5,60 89,60 90.5,60 92,60 93.5,60 95,60 96.5,60 98,60 99.5,60 101,60 102.5,60 104,60 105.5,60
  other v5: 93.5,54 95,54 96.5,54 98,54 99.5,54 101,54 102.5,54 104,54 105.5,54 93.5,55.5 95,55.5 96.5,55.5 98,55.5 99.5,55.5 101,55.5 102.5,55.5 104,55.5 105.5,55.5 93.5,57 95,57 96.5,57 98,57 99.5,57 101,57 102.5,57 104,57 105.5,57
  other v6: 60.8,62.7 60.8,65
  other v8: 80,55.025 60,55.152 80,56.525 60,56.652 80,58.025 60,58.152 80,59.525 60,59.652 80,61.025 60,61.152
  other v11: 27.5,7.3 30,7.3 27.5,23.3 30,23.3 27.5,67.3 30,67.3 27.5,83.3 30,83.3
NetA1_1: A1.1 M1.S M2.D
  other v1: 69,82 70.5,82 72,82 73.5,82 75,82 76.5,82 78,82 79.5,82 81,82 82.5,82 84,82 85.5,82 87,82 88.5,82 90,82 91.5,82 93,82 94.5,82 69,83.5 70.5,83.5 72,83.5 73.5,83.5 75,83.5 76.5,83.5 78,83.5 79.5,83.5 81,83.5 82.5,83.5 84,83.5 85.5,83.5 87,83.5 88.5,83.5 90,83.5 91.5,83.5 93,83.5 94.5,83.5 69,85 70.5,85 72,85 73.5,85 75,85 76.5,85 78,85 79.5,85 81,85 82.5,85 84,85 85.5,85 87,85 88.5,85 90,85 91.5,85 93,85 69,86.5 70.5,86.5 72,86.5 73.5,86.5 75,86.5 76.5,86.5 78,86.5 79.5,86.5 81,86.5 82.5,86.5 84,86.5 85.5,86.5 87,86.5 88.5,86.5 90,86.5 91.5,86.5 93,86.5 69,88 70.5,88 72,88 73.5,88 75,88 76.5,88 78,88 79.5,88 81,88 82.5,88 84,88 85.5,88 87,88 88.5,88 69,89.5 70.5,89.5 72,89.5 73.5,89.5 75,89.5 76.5,89.5 78,89.5 79.5,89.5 81,89.5 82.5,89.5 84,89.5 85.5,89.5 87,89.5 88.5,89.5 69,91 70.5,91 72,91 73.5,91 75,91 76.5,91 78,91 79.5,91 81,91 82.5,91 84,91 85.5,91 87,91 88.5,91 69,92.5 70.5,92.5 72,92.5 73.5,92.5 75,92.5 76.5,92.5 78,92.5 79.5,92.5 81,92.5 82.5,92.5 84,92.5 85.5,92.5 87,92.5 88.5,92.5
  other v4: 93.8,85.15 93.8,85.15 93.8,85.15 94.2,85.15 94.2,85.15 94.2,85.15 94.6,85.15 94.6,85.15 94.6,85.15 95,85.15 95,85.15 95,85.15 93.8,85.55 93.8,85.55 93.8,85.55 93.8,85.55 94.2,85.55 94.2,85.55 94.2,85.55 94.2,85.55 94.6,85.55 94.6,85.55 94.6,85.55 94.6,85.55 95,85.55 95,85.55 95,85.55 95,85.55 93.8,85.95 93.8,85.95 93.8,85.95 93.8,85.95 94.2,85.95 94.2,85.95 94.2,85.95 94.2,85.95 94.6,85.95 94.6,85.95 94.6,85.95 94.6,85.95 95,85.95 95,85.95 95,85.95 95,85.95 93.8,86.35 93.8,86.35 93.8,86.35 93.8,86.35 94.2,86.35 94.2,86.35 94.2,86.35 94.2,86.35 94.6,86.35 94.6,86.35 94.6,86.35 94.6,86.35 95,86.35 95,86.35 95,86.35 93.8,86.75 93.8,86.75 94.2,86.75 94.2,86.75 94.2,86.75 94.6,86.75 94.6,86.75 94.6,86.75 95,86.75 95,86.75
NetA1_2: A1.2 J2.N
  other v1: 97.5,82 99,82 100.5,82 102,82 103.5,82 105,82 97.5,83.5 99,83.5 100.5,83.5 102,83.5 103.5,83.5 105,83.5 99,85 100.5,85 102,85 103.5,85 105,85 99,86.5 100.5,86.5 102,86.5 103.5,86.5 105,86.5 100.5,88 102,88 103.5,88 105,88 100.5,89.5 102,89.5 103.5,89.5 105,89.5
  other v4: 96.1,85.15 96.1,85.15 96.5,85.15 96.5,85.15 96.9,85.15 96.9,85.15 97.3,85.15 97.3,85.15 96.1,85.55 96.1,85.55 96.5,85.55 96.5,85.55 96.9,85.55 96.9,85.55 97.3,85.55 97.3,85.55 96.1,85.95 96.1,85.95 96.5,85.95 96.5,85.95 96.9,85.95 96.9,85.95 97.3,85.95 97.3,85.95 96.1,86.35 96.1,86.35 96.5,86.35 96.5,86.35 96.9,86.35 96.9,86.35 97.3,86.35 97.3,86.35 96.1,86.75 96.1,86.75 96.5,86.75 96.5,86.75 96.9,86.75 96.9,86.75 97.3,86.75 97.3,86.75
NetA1_3: A2.3 FL2.2 | length 4.7
  TOP_SIG w0.38: FL2.2@90.805,30.888 90.805,29.972 92.007,28.77 A2.3
NetA1_4: A1.4 J3.1 | length 119.5
  TOP_SIG w0.38: v6(93.726,89.535) 93.75,89.511 94.385,89.511 94.786,89.11 A1.4
  TOP_SIG w1: J3.1@13.525,61.25 v10(15,61.25)
  PWR w0.5: v10(15,61.25) 16.51,62.76 16.51,84.201 33.909,101.6 86.868,101.6 91.694,96.774 91.694,90.932 93.06,89.566 93.695,89.566 v6(93.726,89.535)
NetA1_6: 10K.2@95.846,91.305 A1.6 | length 2.9
  TOP_SIG w0.38: 10K.2@95.846,91.305 95.996,91.305 96.306,90.995 A1.6
NetA1_7: 66.5K.1@98.546,91.305 A1.7 | length 4.2
  TOP_SIG w0.38: A1.7 98.323,88.225 98.546,88.448 66.5K.1@98.546,91.305
NetA2_1: A2.1 M5.S M6.D
  other v1: 69,22 70.5,22 72,22 73.5,22 75,22 76.5,22 78,22 79.5,22 81,22 82.5,22 84,22 85.5,22 87,22 88.5,22 90,22 91.5,22 93,22 94.5,22 69,23.5 70.5,23.5 72,23.5 73.5,23.5 75,23.5 76.5,23.5 78,23.5 79.5,23.5 81,23.5 82.5,23.5 84,23.5 85.5,23.5 87,23.5 88.5,23.5 90,23.5 91.5,23.5 93,23.5 94.5,23.5 69,25 70.5,25 72,25 73.5,25 75,25 76.5,25 78,25 79.5,25 81,25 82.5,25 84,25 85.5,25 87,25 88.5,25 90,25 91.5,25 93,25 94.5,25 69,26.5 70.5,26.5 72,26.5 73.5,26.5 75,26.5 76.5,26.5 78,26.5 79.5,26.5 81,26.5 82.5,26.5 84,26.5 85.5,26.5 87,26.5 88.5,26.5 90,26.5 91.5,26.5 93,26.5 69,28 70.5,28 72,28 73.5,28 75,28 76.5,28 78,28 79.5,28 81,28 82.5,28 84,28 85.5,28 87,28 88.5,28 69,29.5 70.5,29.5 72,29.5 73.5,29.5 75,29.5 76.5,29.5 78,29.5 79.5,29.5 81,29.5 82.5,29.5 84,29.5 85.5,29.5 87,29.5 88.5,29.5 69,31 70.5,31 72,31 73.5,31 75,31 76.5,31 78,31 79.5,31 81,31 82.5,31 84,31 85.5,31 87,31 88.5,31 69,32.5 70.5,32.5 72,32.5 73.5,32.5 75,32.5 76.5,32.5 78,32.5 79.5,32.5 81,32.5 82.5,32.5 84,32.5 85.5,32.5 87,32.5 88.5,32.5
  other v4: 94.1,25.7 94.1,25.7 94.5,25.7 94.5,25.7 94.9,25.7 94.9,25.7 95.3,25.7 95.3,25.7 94.1,26.1 94.1,26.1 94.1,26.1 94.5,26.1 94.5,26.1 94.5,26.1 94.9,26.1 94.9,26.1 94.9,26.1 95.3,26.1 95.3,26.1 95.3,26.1 94.1,26.5 94.1,26.5 94.1,26.5 94.5,26.5 94.5,26.5 94.5,26.5 94.9,26.5 94.9,26.5 94.9,26.5 95.3,26.5 95.3,26.5 95.3,26.5 94.1,26.9 94.1,26.9 94.1,26.9 94.5,26.9 94.5,26.9 94.5,26.9 94.9,26.9 94.9,26.9 94.9,26.9 95.3,26.9 95.3,26.9 94.1,27.3 94.5,27.3 94.5,27.3 94.9,27.3 94.9,27.3 95.3,27.3
NetA2_2: A2.2 J5.N
  other v1: 97.5,22 99,22 100.5,22 102,22 103.5,22 105,22 97.5,23.5 99,23.5 100.5,23.5 102,23.5 103.5,23.5 105,23.5 97.5,25 99,25 100.5,25 102,25 103.5,25 105,25 99,26.5 100.5,26.5 102,26.5 103.5,26.5 105,26.5 99,28 100.5,28 102,28 103.5,28 105,28 100.5,29.5 102,29.5 103.5,29.5 105,29.5
  other v4: 96.4,25.7 96.8,25.7 97.2,25.7 97.6,25.7 96.4,26.1 96.8,26.1 97.2,26.1 97.6,26.1 96.4,26.5 96.8,26.5 97.2,26.5 97.6,26.5 96.4,26.9 96.8,26.9 97.2,26.9 97.6,26.9 96.4,27.3 96.8,27.3 97.2,27.3 97.6,27.3
NetA2_3: 
NetA2_4: A2.4 J3.10 | length 181.4
  TOP_SIG w0.38: v6(94.107,29.84) 94.206,29.741 94.634,29.741 95.04,29.335 A2.4
  PWR w0.5: v16(15.113,26.797) 15.113,18.25 26.361,7.002 26.361,6.828 27.028,6.161 27.202,6.161 34.506,-1.143 113.411,-1.143 113.838,-0.716 113.838,30.822 113.545,31.115 95.382,31.115 v6(94.107,29.84)
  BTM_SIG w0.5: J3.10 15.113,37.112 v16(15.113,26.797)
NetA2_6: 10K.2@96.1,31.35 A2.6 | length 2.3
  TOP_SIG w0.38: 10K.2@96.1,31.35 96.187,31.35 96.56,30.977 A2.6
NetA2_7: 66.5K.1@98.8,31.35 A2.7 | length 3.7
  TOP_SIG w0.38: A2.7 98.577,28.77 98.8,28.993 66.5K.1@98.8,31.35
NetC6_1: C6.1 C7.1 C11.1 C12.1 C17.1 C18.1 C22.1 C23.1 SS54-HF.1 U1.1 U2.1 U3.1 U4.1
NetC8_1: C8.1 U1.3 | length 3.6
  TOP_SIG w0.3: U1.3 35,83.999 35.001,84 C8.1
NetC8_2: C8.2 U1.5 | length 4.3
  TOP_SIG w0.3: U1.5 37.883,86.45 37.875,86.442 C8.2
NetC13_1: C13.1 U2.3 | length 3.6
  TOP_SIG w0.3: U2.3 35,67.997 35.003,68 C13.1
NetC13_2: C13.2 U2.5 | length 4.1
  TOP_SIG w0.3: U2.5 37.5,70.45 37.875,70.075 C13.2
NetC19_1: C19.1 U3.3 | length 3.5
  TOP_SIG w0.3: U3.3 35,24.152 35.149,24.003 36.122,24.003 C19.1
NetC19_2: C19.2 U3.5 | length 4.2
  TOP_SIG w0.3: U3.5 37.726,26.45 37.875,26.301 C19.2
NetC24_1: C24.1 U4.3 | length 3.5
  TOP_SIG w0.3: U4.3 35,8.15 35.149,8.001 C24.1 C24.1
NetC24_2: C24.2 U4.5 | length 4.2
  TOP_SIG w0.3: U4.5 37.726,10.45 37.875,10.301 C24.2
NetJ2_N: J2.P M3.S M4.D
  other v1: 69,66 70.5,66 72,66 73.5,66 75,66 76.5,66 78,66 79.5,66 81,66 82.5,66 84,66 85.5,66 87,66 88.5,66 90,66 91.5,66 93,66 94.5,66 96,66 97.5,66 99,66 100.5,66 102,66 103.5,66 105,66 106.5,66 108,66 109.5,66 111,66 69,67.5 70.5,67.5 72,67.5 73.5,67.5 75,67.5 76.5,67.5 78,67.5 79.5,67.5 81,67.5 82.5,67.5 84,67.5 85.5,67.5 87,67.5 88.5,67.5 90,67.5 91.5,67.5 93,67.5 94.5,67.5 96,67.5 97.5,67.5 99,67.5 100.5,67.5 102,67.5 103.5,67.5 105,67.5 106.5,67.5 108,67.5 109.5,67.5 111,67.5 69,69 70.5,69 72,69 73.5,69 75,69 76.5,69 78,69 79.5,69 81,69 82.5,69 84,69 85.5,69 87,69 88.5,69 90,69 91.5,69 93,69 94.5,69 96,69 97.5,69 99,69 100.5,69 102,69 103.5,69 105,69 106.5,69 108,69 109.5,69 111,69 69,70.5 70.5,70.5 72,70.5 73.5,70.5 75,70.5 76.5,70.5 78,70.5 79.5,70.5 81,70.5 82.5,70.5 84,70.5 85.5,70.5 87,70.5 88.5,70.5 90,70.5 91.5,70.5 93,70.5 94.5,70.5 96,70.5 97.5,70.5 99,70.5 100.5,70.5 102,70.5 103.5,70.5 105,70.5 106.5,70.5 108,70.5 109.5,70.5 111,70.5 69,72 70.5,72 72,72 73.5,72 75,72 76.5,72 78,72 79.5,72 81,72 82.5,72 84,72 85.5,72 87,72 88.5,72 90,72 91.5,72 93,72 94.5,72 96,72 97.5,72 99,72 100.5,72 102,72 103.5,72 105,72 106.5,72 108,72 109.5,72 111,72 69,73.5 70.5,73.5 72,73.5 73.5,73.5 75,73.5 76.5,73.5 78,73.5 79.5,73.5 81,73.5 82.5,73.5 84,73.5 85.5,73.5 87,73.5 88.5,73.5 90,73.5 91.5,73.5 93,73.5 94.5,73.5 96,73.5 97.5,73.5 99,73.5 100.5,73.5 102,73.5 103.5,73.5 105,73.5 69,75 70.5,75 72,75 73.5,75 75,75 76.5,75 78,75 79.5,75 81,75 82.5,75 84,75 85.5,75 87,75 88.5,75 90,75 91.5,75 93,75 94.5,75 96,75 97.5,75 99,75 100.5,75 102,75 103.5,75 105,75 69,76.5 70.5,76.5 72,76.5 73.5,76.5 75,76.5 76.5,76.5 78,76.5 79.5,76.5 81,76.5 82.5,76.5 84,76.5 85.5,76.5 87,76.5 88.5,76.5 90,76.5 91.5,76.5 93,76.5 94.5,76.5 96,76.5 97.5,76.5 99,76.5 100.5,76.5 102,76.5 103.5,76.5 105,76.5
NetJ3_2: J3.9 U4.7 | length 44.1
  TOP_SIG w0.3: U4.7 35.5,14.291 35.648,14.439 v7(35.648,14.702)
  TOP_SIG w1: v10(12,41.25) J3.9@13.525,41.25
  GND w0.5: v13(11.938,39.624) 11.938,35.853 27.875,19.916 35.368,19.916 36.3,18.984 v13@36.3,17.5
  PWR w0.5: v13(11.938,39.624) 11.969,39.655 11.969,41.219 v10(12,41.25) ; v7(35.648,14.702) 36.322,15.376 v13(36.322,17.526)
NetJ3_3: J3.8 U4.8 | length 48
  TOP_SIG w0.3: v7(34.925,15.113) 35,15.038 U4.8
  TOP_SIG w1: v10(11,43.75) J3.8@13.525,43.75
  GND w0.5: v13(10.668,37.084) 10.668,33.147 26.289,17.526 v13@34.925,17.526
  PWR w0.5: v13(10.668,37.084) 10.668,43.283 11,43.615 v10(11,43.75) ; v7(34.925,15.113) 34.925,17.425 v13(35,17.5)
NetJ3_4: J3.7 U3.7 | length 45.8
  TOP_SIG w0.254: U3.7 35.5,30.346 v7(35.654,30.5)
  TOP_SIG w1: v10(9.8,46.25) J3.7@13.525,46.25
  PWR w0.5: v10(9.8,46.25) 9.144,45.594 9.144,35.56 10.795,33.909 34.544,33.909 35.814,32.639 35.814,30.66 v7(35.654,30.5)
NetJ3_5: J3.6 U3.8 | length 50
  TOP_SIG w0.3: U3.8 v7(35,31)
  TOP_SIG w1: v10(8.624,48.75) J3.6@13.525,48.75
  PWR w0.5: v10(8.624,48.75) 8.624,48.597 7.747,47.72 7.747,34.036 10.783,31 31.439,31 31.543,30.896 34.896,30.896 v7(35,31)
NetJ3_6: J3.5 U2.7 | length 42.2
  TOP_SIG w0.3: U2.7 35.5,74.489 35.7,74.689 v7(35.7,74.8)
  TOP_SIG w1: J3.5 v10(15,51.25)
  PWR w0.5: v10(15,51.25) 17.976,51.25 26.035,59.309 26.035,74.041 27.051,75.057 30.861,75.057 31.118,74.8 v7(35.7,74.8)
NetJ3_7: J3.4 U2.8 | length 43.1
  TOP_SIG w0.3: U2.8 35,74.878 35,75.5 v7(35.1,75.6)
  TOP_SIG w1: J3.4@13.525,53.75 v10(15,53.75)
  PWR w0.5: v10(15,53.75) 17.301,53.75 24.13,60.579 24.13,74.676 26.67,77.216 34.798,77.216 35.1,76.914 v7(35.1,75.6)
NetJ3_8: J3.3 U1.7 | length 48.8
  TOP_SIG w0.3: U1.7 35.5,90.28 v7(35.7,90.48)
  TOP_SIG w1: J3.3@13.525,56.25 v10(15,56.25)
  PWR w0.5: v10(15,56.25) 22.352,63.602 22.352,83.163 27.581,88.392 30.353,88.392 32.441,90.48 v7(35.7,90.48)
NetJ3_9: J3.2 U1.8 | length 51.7
  TOP_SIG w0.3: U1.8 35,91.217 35.052,91.269 v7(35.052,92.067)
  TOP_SIG w1: J3.2@13.525,58.75 v10(15,58.75)
  PWR w0.5: v10(15,58.75) 19.812,63.562 19.812,84.582 29.083,93.853 33.266,93.853 v7(35.052,92.067)
NetJ5_N: J5.P M7.S M8.D
  other v1: 70.5,6 72,6 73.5,6 75,6 76.5,6 78,6 79.5,6 81,6 82.5,6 84,6 85.5,6 87,6 88.5,6 90,6 91.5,6 93,6 94.5,6 96,6 97.5,6 99,6 100.5,6 102,6 103.5,6 105,6 106.5,6 108,6 109.5,6 111,6 70.5,7.5 72,7.5 73.5,7.5 75,7.5 76.5,7.5 78,7.5 79.5,7.5 81,7.5 82.5,7.5 84,7.5 85.5,7.5 87,7.5 88.5,7.5 90,7.5 91.5,7.5 93,7.5 94.5,7.5 96,7.5 97.5,7.5 99,7.5 100.5,7.5 102,7.5 103.5,7.5 105,7.5 106.5,7.5 108,7.5 109.5,7.5 111,7.5 70.5,9 72,9 73.5,9 75,9 76.5,9 78,9 79.5,9 81,9 82.5,9 84,9 85.5,9 87,9 88.5,9 90,9 91.5,9 93,9 94.5,9 96,9 97.5,9 99,9 100.5,9 102,9 103.5,9 105,9 106.5,9 108,9 109.5,9 111,9 70.5,10.5 72,10.5 73.5,10.5 75,10.5 76.5,10.5 78,10.5 79.5,10.5 81,10.5 82.5,10.5 84,10.5 85.5,10.5 87,10.5 88.5,10.5 90,10.5 91.5,10.5 93,10.5 94.5,10.5 96,10.5 97.5,10.5 99,10.5 100.5,10.5 102,10.5 103.5,10.5 105,10.5 106.5,10.5 108,10.5 109.5,10.5 111,10.5 70.5,12 72,12 73.5,12 75,12 76.5,12 78,12 79.5,12 81,12 82.5,12 84,12 85.5,12 87,12 88.5,12 90,12 91.5,12 93,12 94.5,12 96,12 97.5,12 99,12 100.5,12 102,12 103.5,12 105,12 106.5,12 108,12 109.5,12 111,12 70.5,13.5 72,13.5 73.5,13.5 75,13.5 76.5,13.5 78,13.5 79.5,13.5 81,13.5 82.5,13.5 84,13.5 85.5,13.5 87,13.5 88.5,13.5 90,13.5 91.5,13.5 93,13.5 94.5,13.5 96,13.5 97.5,13.5 99,13.5 100.5,13.5 102,13.5 103.5,13.5 105,13.5 70.5,15 72,15 73.5,15 75,15 76.5,15 78,15 79.5,15 81,15 82.5,15 84,15 85.5,15 87,15 88.5,15 90,15 91.5,15 93,15 94.5,15 96,15 97.5,15 99,15 100.5,15 102,15 103.5,15 105,15 70.5,16.5 72,16.5 73.5,16.5 75,16.5 76.5,16.5 78,16.5 79.5,16.5 81,16.5 82.5,16.5 84,16.5 85.5,16.5 87,16.5 88.5,16.5 90,16.5 91.5,16.5 93,16.5 94.5,16.5 96,16.5 97.5,16.5 99,16.5 100.5,16.5 102,16.5 103.5,16.5 105,16.5
NetM1_G: M1.G U1.4 | length 57.3
  TOP_SIG w0.3: U1.4 35.5,85.404 35.504,85.4 v7(36,85.4)
  TOP_SIG w1.7: v6(60,84) M1.G
  PWR w0.5: v7(36,85.4) 37.14,85.4 37.465,85.725 37.465,98.679 37.973,99.187 59.436,99.187 60.135,98.488 60.135,93.789 60.863,93.061 61.849,93.061 61.849,87.309 M1.G v6(60,84)
NetM2_G: M2.G U1.10 | length 55.2
  TOP_SIG w0.3: v7(33.1,89.5) 33.15,89.55 U1.10
  TOP_SIG w1.7: M2.G v6(65,92)
  PWR w0.5: v7(33.1,89.5) 33.1,88.939 33.393,88.646 36.283,88.646 36.576,88.939 36.576,100.037 36.869,100.33 64.262,100.33 66.167,98.425 66.167,93.167 v6(65,92)
NetM3_G: M3.G U2.4 | length 81.6
  TOP_SIG w0.3: U2.4 35.5,69.402 35.602,69.3 v7(36.4,69.3)
  TOP_SIG w1.7: v6(60,68) M3.G
  PWR w0.5: v7(36.4,69.3) 39.37,72.27 39.37,97.116 39.663,97.409 57.599,97.409 57.892,97.116 57.892,82.697 58.646,81.943 58.646,70.132 59.088,69.69 59.77,69.69 M3.G v6(60,68)
NetM4_G: M4.G U2.10 | length 79.5
  TOP_SIG w0.3: v7(33.1,73.5) 33.15,73.55 U2.10
  TOP_SIG w1.7: M4.G v6(65,76)
  PWR w0.5: v7(33.1,73.5) 33.1,72.302 33.393,72.009 36.576,72.009 38.354,73.787 38.354,97.751 38.901,98.298 58.099,98.298 58.646,97.751 58.646,83.594 59.194,83.046 60.395,83.046 65,78.441 v6(65,76)
NetM5_G: M5.G U3.4 | length 89.1
  TOP_SIG w0.3: U3.4 35.5,25.587 35.687,25.4 v7(36,25.4)
  TOP_SIG w1.7: v6(60,24) M5.G
  PWR w0.5: v7(36,25.4) 32.385,21.785 32.385,17.176 33.104,16.457 33.104,15.543 32.385,14.824 32.385,3.737 35.233,0.889 66.89,0.889 67.183,1.182 67.183,17.78 60.963,24 v6(60,24)
NetM6_G: M6.G U3.10 | length 103.3
  TOP_SIG w0.3: v7(33.4,29.5) 33.45,29.55 U3.10
  TOP_SIG w1.7: M6.G v6(65,32)
  PWR w0.5: v7(33.4,29.5) 33.4,24.891 30.099,21.59 30.099,12.192 31.496,10.795 31.496,3.559 35.182,-0.127 68.827,-0.127 69.12,0.166 69.12,18.129 62.611,24.638 62.611,28.151 M6.G
NetM7_G: M7.G U4.4 | length 36.1
  TOP_SIG w0.3: U4.4 35.5,9.458 35.687,9.271 v7(36.195,9.271)
  TOP_SIG w1.7: v6(60,9.06) M7.G
  PWR w0.5: v7(36.195,9.271) 38.696,9.271 38.989,8.978 38.989,3.468 39.282,3.175 56.261,3.175 60,6.914 v6(60,9.06) ; M7.G@59.838,9.298 M7.G v6(60,9.06) ; M7.G@60,9.135 v6(60,9.06)
NetM8_G: M8.G U4.10 | length 53.5
  TOP_SIG w0.254: v7@33.313,13.55 U4.10
  TOP_SIG w1.7: M8.G v6(65,16)
  PWR w0.5: v7(33.274,13.589) 33.274,3.914 35.156,2.032 56.769,2.032 62.357,7.62 62.357,13.357 v6(65,16)
NetR3_2: R3.2 U1.6
NetR4_2: R4.2 U2.6
NetR7_2: R7.2 U3.6
NetR8_2: R8.2 U4.6
VBAT1: C1.1 C2.1 C3.1 C4.1 C9.1 C10.1 C14.1 C15.1 C20.1 C21.1 J1.P M1.D M3.D M5.D M7.D SMCJ58A.C
  other v3: 41,7.5 42.5,7.5 44,7.5 45.5,7.5 47,7.5 48.5,7.5 50,7.5 51.5,7.5 53,7.5 41,9 42.5,9 44,9 45.5,9 47,9 48.5,9 50,9 51.5,9 53,9 41,10.5 42.5,10.5 44,10.5 45.5,10.5 47,10.5 48.5,10.5 50,10.5 51.5,10.5 53,10.5 41,12 42.5,12 44,12 45.5,12 47,12 48.5,12 50,12 51.5,12 53,12 41,13.5 42.5,13.5 44,13.5 45.5,13.5 47,13.5 48.5,13.5 50,13.5 51.5,13.5 53,13.5 41,15 42.5,15 44,15 45.5,15 47,15 48.5,15 50,15 51.5,15 53,15 41,16.5 42.5,16.5 44,16.5 45.5,16.5 47,16.5 48.5,16.5 50,16.5 51.5,16.5 53,16.5 41,23.5 42.5,23.5 44,23.5 45.5,23.5 47,23.5 48.5,23.5 50,23.5 51.5,23.5 53,23.5 41,25 42.5,25 44,25 45.5,25 47,25 48.5,25 50,25 51.5,25 53,25 41,26.5 42.5,26.5 44,26.5 45.5,26.5 47,26.5 48.5,26.5 50,26.5 51.5,26.5 53,26.5 41,28 42.5,28 44,28 45.5,28 47,28 48.5,28 50,28 51.5,28 53,28 41,29.5 42.5,29.5 44,29.5 45.5,29.5 47,29.5 48.5,29.5 50,29.5 51.5,29.5 53,29.5 41,31 42.5,31 44,31 45.5,31 47,31 48.5,31 50,31 51.5,31 53,31 41,32.5 42.5,32.5 44,32.5 45.5,32.5 47,32.5 48.5,32.5 50,32.5 51.5,32.5 53,32.5 41,67.5 42.5,67.5 44,67.5 45.5,67.5 47,67.5 48.5,67.5 50,67.5 51.5,67.5 53,67.5 41,69 42.5,69 44,69 45.5,69 47,69 48.5,69 50,69 51.5,69 53,69 41,70.5 42.5,70.5 44,70.5 45.5,70.5 47,70.5 48.5,70.5 50,70.5 51.5,70.5 53,70.5 41,72 42.5,72 44,72 45.5,72 47,72 48.5,72 50,72 51.5,72 53,72 41,73.5 42.5,73.5 44,73.5 45.5,73.5 47,73.5 48.5,73.5 50,73.5 51.5,73.5 53,73.5 41,75 42.5,75 44,75 45.5,75 47,75 48.5,75 50,75 51.5,75 53,75 41,76.5 42.5,76.5 44,76.5 45.5,76.5 47,76.5 48.5,76.5 50,76.5 51.5,76.5 53,76.5 41,83.5 42.5,83.5 44,83.5 45.5,83.5 47,83.5 48.5,83.5 50,83.5 51.5,83.5 53,83.5 41,85 42.5,85 44,85 45.5,85 47,85 48.5,85 50,85 51.5,85 53,85 41,86.5 42.5,86.5 44,86.5 45.5,86.5 47,86.5 48.5,86.5 50,86.5 51.5,86.5 53,86.5 41,88 42.5,88 44,88 45.5,88 47,88 48.5,88 50,88 51.5,88 53,88 41,89.5 42.5,89.5 44,89.5 45.5,89.5 47,89.5 48.5,89.5 50,89.5 51.5,89.5 53,89.5 41,91 42.5,91 44,91 45.5,91 47,91 48.5,91 50,91 51.5,91 53,91 41,92.5 42.5,92.5 44,92.5 45.5,92.5 47,92.5 48.5,92.5 50,92.5 51.5,92.5 53,92.5
  other v8: 93.5,45.4 95,45.4 96.5,45.4
  other v9: 57.2,18.9 57.2,21.2 57.15,34.417 57.15,37.641 57.2,62.7 57.2,65 57.2,79 57.2,81.1
pads on no net: J1.S1 J1.S2 J2.S1 J2.S2 J5.S1 J5.S2 U1.2 U2.2 U3.2 U4.2

## Polygon pours and split planes (outlines as drawn)
NetJ5_N on BTM_SIG "NETJ5_N_L04_P014" (solid, pour order 14): 58.88,13.21 61.722,13.21 61.722,4.955 112.522,4.955 112.522,17.655 58.88,17.655
NetJ2_N on BTM_SIG "NETJ2_N_L04_P012" (solid, pour order 12): 58.88,73.21 61.849,73.21 61.849,64.955 112.776,64.955 112.776,77.655 58.88,77.655
NetA2_1 on BTM_SIG "NETA2_1_L04_P010" (solid, pour order 10): 58.88,29.21 61.849,29.21 61.849,20.955 95.631,20.955 95.631,33.655 58.88,33.655
NetA1_1 on BTM_SIG "NETA1_1_L04_P009" (solid, pour order 9): 58.88,89.21 61.849,89.21 61.849,80.955 95.504,80.955 95.504,93.655 58.88,93.655
GND on BTM_SIG "GND_L04_P001" (solid, remove dead copper, pour order 1): 39.37,98.298 39.497,98.425 58.293,98.425 58.293,64 119.38,64 119.38,34.544 58.547,34.544 58.547,32.385 58.547,2.667 39.624,2.667
NetA1_2 on BTM_SIG "NETA1_2_L04_P021" (solid, pour order 21): 95.758,90.353 115,90.353 115,81.026 95.758,81.026
NetA2_2 on BTM_SIG "NETA2_2_L04_P019" (solid, pour order 19): 96.012,30.353 115.189,30.353 115.189,21.082 96.012,21.082
GND on BTM_SIG "GND_L04_P000" (solid, pour order 0): 7.747,98.806 38.735,98.806 38.735,2.667 8.89,2.667 8.89,10.287 5.461,10.287 5.461,90.551 7.747,90.551
NetJ5_N on TOP_SIG "NETJ5_N_L01_P007" (solid, pour order 7): 58.88,13.21 61.849,13.21 61.849,4.955 112.522,4.955 112.522,17.655 58.88,17.655
NetJ2_N on TOP_SIG "NETJ2_N_L01_P006" (solid, pour order 6): 58.88,73.21 61.849,73.21 61.849,64.955 112.776,64.955 112.776,77.655 58.88,77.655
NetA1_1 on TOP_SIG "NETA1_1_L01_P005" (solid, pour order 5): 58.88,89.21 61.849,89.21 61.849,80.955 95.504,80.955 95.504,93.655 58.88,93.655
NetA2_1 on TOP_SIG "NETA2_1_L01_P004" (solid, pour order 4): 58.88,29.21 61.849,29.21 61.849,20.955 95.596,20.955 95.596,27.505 95.596,33.655 58.88,33.655
VBAT1 on TOP_SIG "VBAT1_L01_P017" (solid, pour order 17): 39.37,98.298 39.497,98.425 58.293,98.425 58.293,60.833 119.38,60.833 119.38,35.814 113.157,35.814 101.219,35.814 58.547,35.814 58.547,32.385 58.547,2.667 39.624,2.667
NetA1_2 on TOP_SIG "NETA1_2_L01_P020" (solid, pour order 20): 95.758,90.353 115,90.353 115,81.026 95.758,81.026
NetA2_2 on TOP_SIG "NETA2_2_L01_P016" (solid, pour order 16): 96.012,30.353 115,30.353 115,21.082 96.012,21.082
VBAT1 on GND "VBAT1_L02_P018" (solid, pour order 18): 39.751,99.098 119.253,98.846 119.253,2.032 39.751,2.032
VBAT1 on GND "VBAT1_L02_P002" (solid, pour order 2): 39.37,98.298 39.497,98.425 58.293,98.425 58.293,60.833 119.253,60.833 119.253,35.814 113.157,35.814 101.219,35.814 58.547,35.814 58.547,32.385 58.547,2.667 39.624,2.667
GND on PWR "GND_L03_P003" (solid, pour order 3): 39.751,99.098 119.239,99.098 119.267,2.667 117.475,2.667 39.751,2.667

## Keep-outs
Keep-Out Layer:
  lines w0.254: 4,63.873 4,53.477 4,46.269 4,36 0,36 0,0 5,-5 115,-5 ; 4,64 0,64 0,100 ; 0,100 5,105 115,105 ; 0,100 0,100 ; 115,-5 120,0 120,100 115,105 ; 115,-5 115,-5 ; 115,105 115,105

## Other copper
TOP_SIG:
  rectangle net GND: 92.837,52.07 112.268,58.293
  rectangle net GND: 58.9,78.15 61.3,82.15
  rectangle net GND: 58.9,61.85 61.3,65.85
  rectangle net GND: 26.75,82.55 30.75,85.55
  rectangle net GND: 26.75,66.55 30.75,69.55
  rectangle net GND: 58.9,18.05 61.3,22.05
  rectangle net GND: 58.9,34.15 61.3,38.15
  rectangle net GND: 26.75,22.55 30.75,25.55
  rectangle net GND: 26.75,6.55 30.75,9.55
  rectangle net NetC6_1: 22.813,86.415 31.242,88.828
  rectangle net NetC6_1: 31.115,86.614 32.762,88.828
  rectangle net NetC6_1: 31.1,86.025 33.9,86.875
  rectangle net NetC6_1: 31.1,70.025 33.9,70.875
  rectangle net NetC6_1: 31.238,70.668 32.762,72.827
  rectangle net NetC6_1: 22.975,70.414 31.369,72.827
  rectangle net NetC6_1: 22.815,10.811 25.621,88.773
  rectangle net NetC6_1: 22.816,10.414 31.369,12.827
  rectangle net NetC6_1: 31.1,10.025 33.9,10.875
  rectangle net NetC6_1: 31.238,10.668 32.762,12.827
  rectangle net NetC6_1: 31.238,26.668 32.762,28.827
  rectangle net NetC6_1: 31.1,26.025 33.9,26.875
  rectangle net NetC6_1: 22.975,26.414 31.369,28.827
  rectangle net NetR4_2: 36.21,73.125 36.65,75.467
  rectangle net NetR4_2: 36.047,73.125 36.322,73.975
  rectangle net NetR3_2: 36.129,89.124 36.449,89.976
  rectangle net NetR8_2: 36.12,13.125 36.209,13.975
  rectangle net NetR7_2: 35.941,29.125 36.283,29.975
  rectangle net NetR3_2: 36.322,89.124 36.83,92.652
  rectangle net 12V: 18.669,65.151 21.082,67.818
  rectangle net 3V3: 31.369,91.35 34.288,92.65
  rectangle net NetR7_2: 36.195,29.125 36.65,31.369
  rectangle net NetR8_2: 36.157,13.125 36.649,15.38
BTM_SIG:
  rectangle net NetA1_2: 95.758,84.836 97.6,87.122
  rectangle net NetA1_1: 93.494,84.85 95.331,87.136
  rectangle net NetA2_2: 96.012,25.4 97.822,27.686
  rectangle net NetA2_1: 93.794,25.4 95.631,27.686

## Silkscreen, mask and mechanical layers (free items; w line width, h text height)
Top Overlay:
  drawing of 58 lines, arcs and shapes, not listed
  text "10K" at 34,93.5 h0.8
  text "A+" at 115.5,91.4 h1.5
  text ".47u" at 35.6,81.8 h0.8
  text "3V3" at 18.153,81.667 h1
  text ".1u" at 26.489,81.4 h0.8
  text "10u" at 29.029,81.4 h0.8
  text "1u" at 62.254,80.554 h1
  text ".1u" at 62.254,78.454 h1
  text "10K" at 34,77.5 h0.8
  text "12V" at 2.886,77.254 h1
  text "A-" at 115.5,67.4 h1.5
  text ".47u" at 35.6,65.8 h0.8
  text ".1u" at 26.209,65.4 h0.8
  text "10u" at 28.749,65.4 h0.8
  text "1u" at 62.254,64.554 h1
  text ".1u" at 62.254,62.454 h1
  text "ACSA" at 17.6,62.13 h0.5 r270
  text "GND" at 114.5,61.4 h1.5
  text "A+LS" at 17.6,59.717 h0.5 r270
  text "A+HS" at 17.6,57.177 h0.5 r270
  text "A-LS" at 17.6,54.51 h0.5 r270
  text "A-HS" at 17.6,52.097 h0.5 r270
  text "B+LS" at 17.6,49.557 h0.5 r270
  text "B+HS" at 17.6,47.144 h0.5 r270
  text "B-LS" at 17.6,44.604 h0.5 r270
  text "B-HS" at 17.6,42.191 h0.5 r270
  text "ACSB" at 17.6,39.692 h0.5 r270
  text "VCC" at 114.5,37.4 h1.5
  text "1u" at 62.254,36.854 h1
  text ".1u" at 62.254,34.654 h1
  text "10K" at 34,33.5 h0.8
  text "B+" at 115.5,31.4 h1.5
  text ".47u" at 35.5,21.8 h0.8
  text ".1u" at 26.463,21.4 h0.8
  text "10u" at 29.003,21.4 h0.8
  text "1u" at 62.254,20.554 h1
  text ".1u" at 62.254,18.454 h1
  text "10K" at 34,17.5 h0.8
  text "B-" at 115.5,7.4 h1.5
  text ".47u" at 35.5,5.8 h0.8
  text ".1u" at 26.463,5.4 h0.8
  text "10u" at 29.003,5.4 h0.8
Bottom Overlay:
  region: 19.959,77.642 20.022,77.642 20.022,77.621 20.043,77.621 20.043,77.558 20.022,77.558 20.022,77.537 18.383,77.537 18.383,77.558 18.362,77.558 18.362,77.621 18.383,77.621 18.383,77.642 19.938,77.642
  region: 19.139,78.525 19.139,79.008 19.16,79.008 19.16,79.071 19.181,79.071 19.181,79.113 19.202,79.113 19.202,79.092 19.223,79.092 19.223,79.071 19.265,79.071 19.265,77.978 20.359,77.978 20.359,77.957 20.38,77.957 20.38,77.873 18.046,77.873 18.046,77.894 18.025,77.894 18.025,77.957 18.046,77.957 18.046,77.978 19.139,77.978 19.139,78.504
  region: 18.845,77.305 19.686,77.305 19.686,77.284 19.707,77.284 19.707,77.221 19.686,77.221 19.686,77.2 18.719,77.2 18.719,77.221 18.698,77.221 18.698,77.284 18.719,77.284 18.719,77.305 18.824,77.305
  region: 19.055,76.969 19.35,76.969 19.35,76.948 19.371,76.948 19.371,76.885 19.35,76.885 19.35,76.864 19.076,76.864 19.076,76.885 19.055,76.885 19.055,76.948
  region: 3.311,81.948 3.248,81.948 3.248,81.927 3.227,81.927 3.227,81.864 3.248,81.864 3.248,81.843 4.888,81.843 4.888,81.864 4.909,81.864 4.909,81.927 4.888,81.927 4.888,81.948 3.332,81.948
  region: 4.215,81.276 3.921,81.276 3.921,81.255 3.9,81.255 3.9,81.192 3.921,81.192 3.921,81.171 4.194,81.171 4.194,81.192 4.215,81.192 4.215,81.255
  region: 4.131,82.831 4.131,83.315 4.11,83.315 4.11,83.378 4.089,83.378 4.089,83.42 4.068,83.42 4.068,83.399 4.047,83.399 4.047,83.378 4.005,83.378 4.005,82.285 2.912,82.285 2.912,82.264 2.891,82.264 2.891,82.18 5.224,82.18 5.224,82.201 5.245,82.201 5.245,82.264 5.224,82.264 5.224,82.285 4.131,82.285 4.131,82.81
  region: 4.426,81.612 3.585,81.612 3.585,81.591 3.564,81.591 3.564,81.528 3.585,81.528 3.585,81.507 4.552,81.507 4.552,81.528 4.573,81.528 4.573,81.591 4.552,81.591 4.552,81.612 4.447,81.612
  lines w0.2: 11.811,37.465 18.811,37.465 ; 11.811,40.005 18.811,40.005 ; 11.811,42.505 18.811,42.505 ; 11.811,45.005 18.811,45.005 ; 11.811,47.505 18.811,47.505 ; 11.811,50.005 18.811,50.005 ; 11.811,52.505 18.811,52.505 ; 11.811,55.005 18.811,55.005 ; 11.811,57.505 18.811,57.505 ; 11.811,60.005 18.811,60.005 ; 11.811,62.484 18.811,62.484 ; 16.891,37.465 16.891,62.484
  text "+A" at 115.5,91.4 h1.5
  text "3V3" at 20.828,81.661 h1
  text "12V" at 5.304,77.243 h1
  text "-A" at 115.5,67.4 h1.5
  text "ACSA" at 18.1,62.15 h0.5 r90
  text "GND" at 118.481,61.403 h1.5
  text "A+LS" at 18.1,59.7 h0.5 r90
  text "A+HS" at 18.1,57.175 h0.5 r90
  text "A-LS" at 18.1,54.65 h0.5 r90
  text "A-HS" at 18.1,52.2 h0.5 r90
  text "B+LS" at 18.1,49.7 h0.5 r90
  text "B+HS" at 18.1,47.15 h0.5 r90
  text "B-LS" at 18.1,44.7 h0.5 r90
  text "B-HS" at 18.1,42.192 h0.5 r90
  text "ACSB" at 18.1,39.692 h0.5 r90
  text "VCC" at 118.499,37.33 h1.5
  text "B+" at 117.991,32.901 h1.5 r180
  text "B-" at 118.007,7.398 h1.5

## Text inside footprints (layer, text, board x,y; h text height)
A1: Top Overlay "IP-" at 97.667,85.881 h0.2; Top Overlay "IP+" at 92.939,85.884 h0.2; Top Overlay "VOC" at 97.725,88.123 h0.2; Top Overlay "FAULT" at 96.408,89.135 h0.2 r90; Top Overlay "GND" at 95.647,89.135 h0.2 r90; Top Overlay "VOUT" at 94.885,89.128 h0.2 r90; Top Overlay "VDD" at 92.879,88.138 h0.2
A2: Top Overlay "VDD" at 93.133,28.683 h0.2; Top Overlay "VOUT" at 95.139,29.673 h0.2 r90; Top Overlay "GND" at 95.901,29.68 h0.2 r90; Top Overlay "FAULT" at 96.662,29.68 h0.2 r90; Top Overlay "VOC" at 97.979,28.668 h0.2; Top Overlay "IP+" at 93.193,26.429 h0.2; Top Overlay "IP-" at 97.921,26.426 h0.2
M1: Top Overlay "Gate" at 61.6,84.544 h0.5 r90; Top Overlay "Drn" at 61.6,87.3 h0.5 r90; Top Overlay "Src" at 61.6,89.95 h0.5 r90; Bottom Overlay "Gate" at 61.6,86.3 h0.5 r90; Bottom Overlay "Drn" at 61.6,88.63 h0.5 r90; Bottom Overlay "Src" at 61.6,91.3 h0.5 r90
M2: Top Overlay "Src" at 63.4,86.05 h0.5 r270; Top Overlay "Drn" at 63.4,88.7 h0.5 r270; Top Overlay "Gate" at 63.4,91.456 h0.5 r270; Bottom Overlay "Src" at 63.4,84.7 h0.5 r270; Bottom Overlay "Drn" at 63.4,87.37 h0.5 r270; Bottom Overlay "Gate" at 63.4,89.7 h0.5 r270
M3: Top Overlay "Gate" at 61.6,68.544 h0.5 r90; Top Overlay "Drn" at 61.6,71.3 h0.5 r90; Top Overlay "Src" at 61.6,73.95 h0.5 r90; Bottom Overlay "Gate" at 61.6,70.3 h0.5 r90; Bottom Overlay "Drn" at 61.6,72.63 h0.5 r90; Bottom Overlay "Src" at 61.6,75.3 h0.5 r90
M4: Top Overlay "Src" at 63.4,70.05 h0.5 r270; Top Overlay "Drn" at 63.4,72.7 h0.5 r270; Top Overlay "Gate" at 63.4,75.456 h0.5 r270; Bottom Overlay "Src" at 63.4,68.7 h0.5 r270; Bottom Overlay "Drn" at 63.4,71.37 h0.5 r270; Bottom Overlay "Gate" at 63.4,73.7 h0.5 r270
M5: Top Overlay "Gate" at 61.6,24.544 h0.5 r90; Top Overlay "Drn" at 61.6,27.3 h0.5 r90; Top Overlay "Src" at 61.6,29.95 h0.5 r90; Bottom Overlay "Gate" at 61.6,26.3 h0.5 r90; Bottom Overlay "Drn" at 61.6,28.63 h0.5 r90; Bottom Overlay "Src" at 61.6,31.3 h0.5 r90
M6: Top Overlay "Src" at 63.4,26.05 h0.5 r270; Top Overlay "Drn" at 63.4,28.7 h0.5 r270; Top Overlay "Gate" at 63.4,31.456 h0.5 r270; Bottom Overlay "Src" at 63.4,24.7 h0.5 r270; Bottom Overlay "Drn" at 63.4,27.37 h0.5 r270; Bottom Overlay "Gate" at 63.4,29.7 h0.5 r270
M7: Top Overlay "Gate" at 61.6,8.544 h0.5 r90; Top Overlay "Drn" at 61.6,11.3 h0.5 r90; Top Overlay "Src" at 61.6,13.95 h0.5 r90; Bottom Overlay "Gate" at 61.6,10.3 h0.5 r90; Bottom Overlay "Drn" at 61.6,12.63 h0.5 r90; Bottom Overlay "Src" at 61.6,15.3 h0.5 r90
M8: Top Overlay "Src" at 63.4,10.05 h0.5 r270; Top Overlay "Drn" at 63.4,12.7 h0.5 r270; Top Overlay "Gate" at 63.4,15.456 h0.5 r270; Bottom Overlay "Src" at 63.4,8.7 h0.5 r270; Bottom Overlay "Drn" at 63.4,11.37 h0.5 r270; Bottom Overlay "Gate" at 63.4,13.7 h0.5 r270